# EAGLE board femtoBeacon_PRO_r3.0.1_single_sided_PANELIZED_1x5 (EAGLE 7.6.0), part 1 of 4
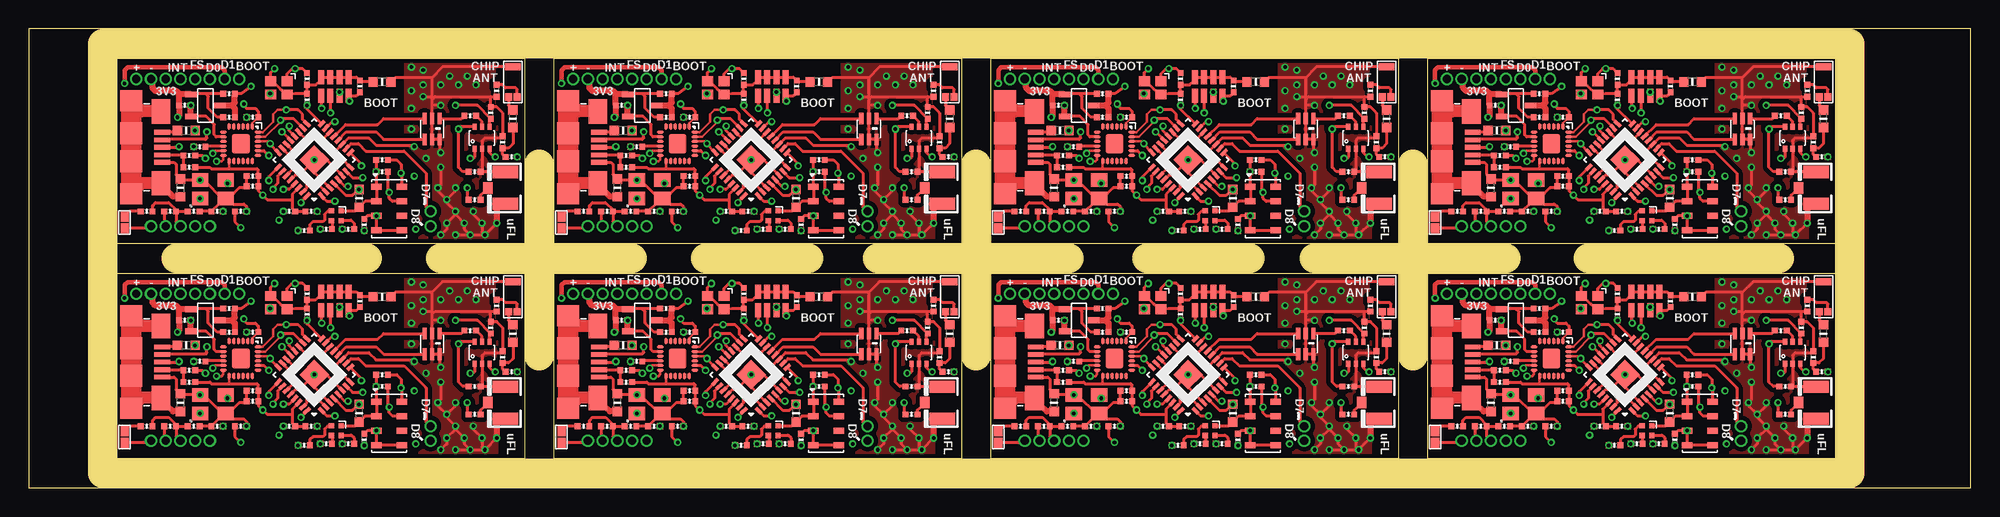
[diagram p0: board, top side]
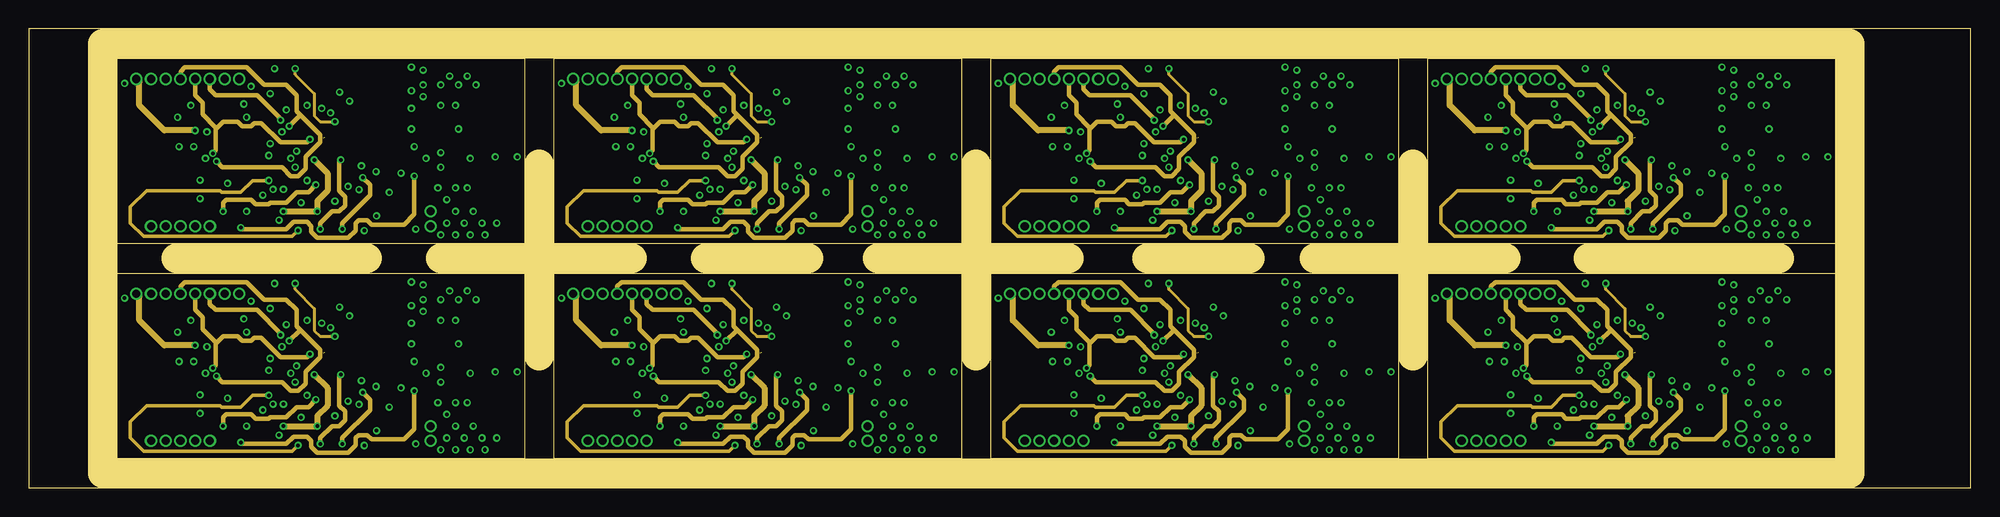
[diagram p1: board, inner layer Route2]
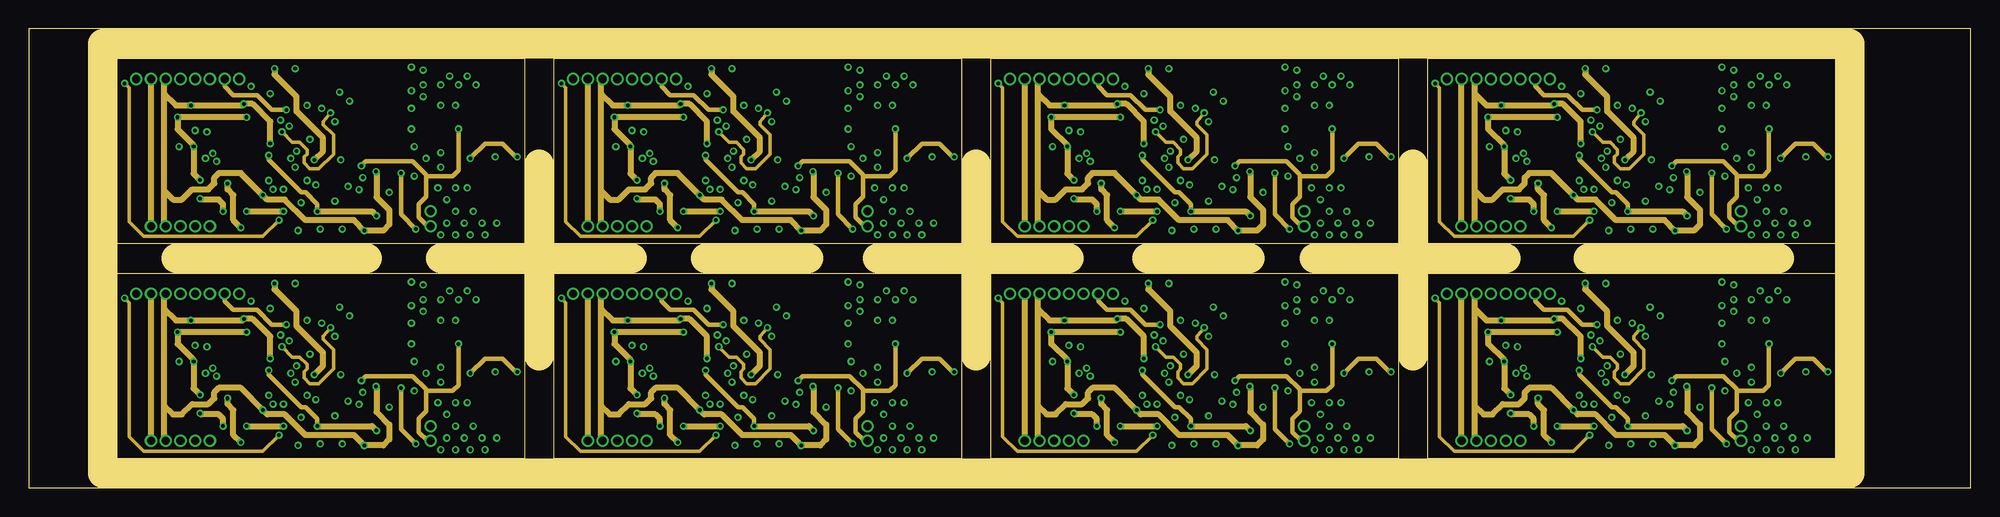
[diagram p2: board, inner layer Route15]
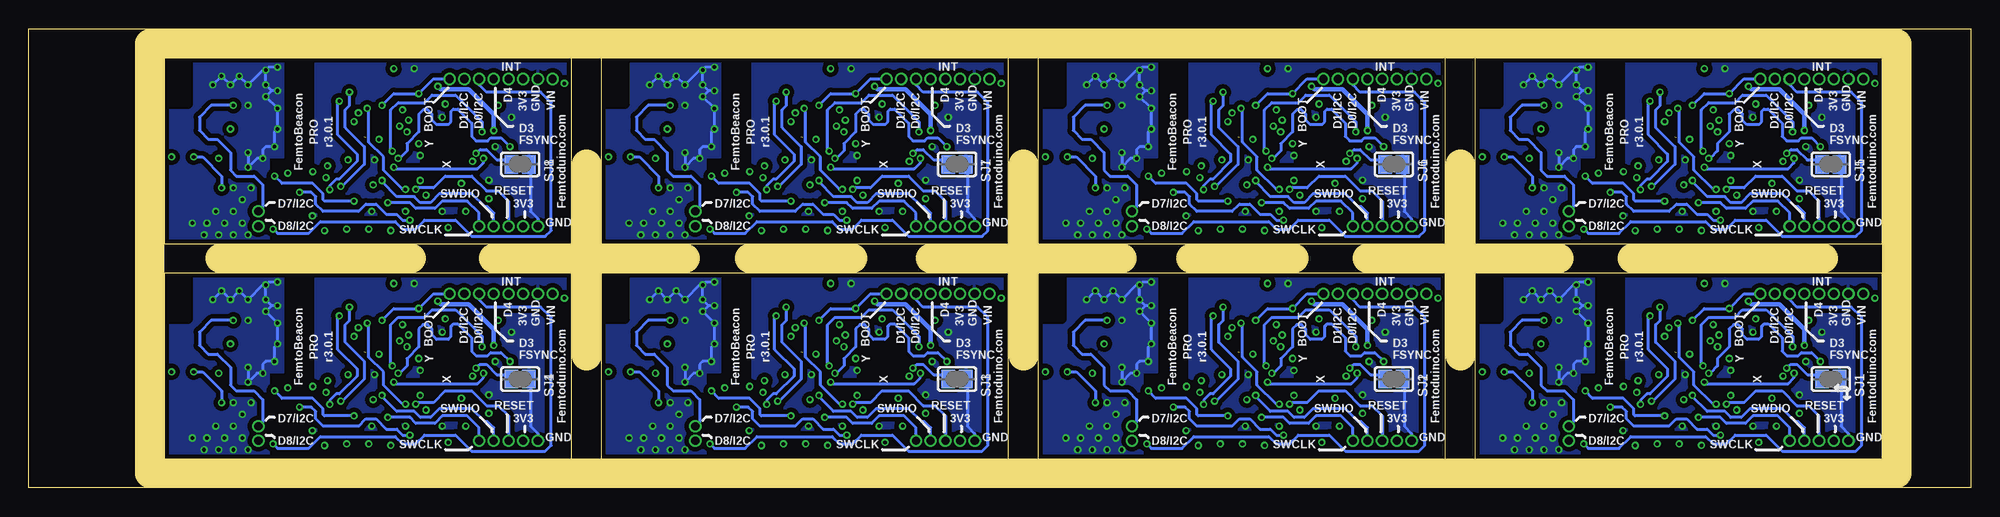
[diagram p3: board, bottom side, seen from below]

Size 167.64 x 39.62 mm. Coordinates in mm from the lower left corner, seen from the top.
Outline: 7.62,2.54 7.62,18.54 42.8,18.54 42.8,2.54 7.62,2.54
Outline: 45.34,2.54 45.34,18.54 80.52,18.54 80.52,2.54 45.34,2.54
Outline: 83.06,2.54 83.06,18.54 118.24,18.54 118.24,2.54 83.06,2.54
Outline: 120.78,2.54 120.78,18.54 155.96,18.54 155.96,2.54 120.78,2.54
Outline: 7.62,21.08 7.62,37.08 42.8,37.08 42.8,21.08 7.62,21.08
Outline: 45.34,21.08 45.34,37.08 80.52,37.08 80.52,21.08 45.34,21.08
Outline: 83.06,21.08 83.06,37.08 118.24,37.08 118.24,21.08 83.06,21.08
Outline: 120.78,21.08 120.78,37.08 155.96,37.08 155.96,21.08 120.78,21.08
Outline: 0,0 167.64,0 167.64,39.62 0,39.62 0,0
Copper layers (1*2*15*16): Top 0.035mm / dielectric 0.23mm / Route2 0.035mm / dielectric 0.93mm / Route15 0.035mm / dielectric 0.23mm / Bottom 0.035mm
Design rules "MF_Standard_4_Layer": minimum track width 6mil, minimum drill 12mil, track to track 6mil, track to pad 6mil, pad to pad 6mil, via to via 6mil, smd to smd 0mil, copper to edge 10mil, drill to drill 10mil, minimum pad ring 6mil, minimum via ring 6mil, stop-mask expansion 2mil, vias tented up to drill 25mil, thermal gap 10mil
tRestrict: area 40.8,14.6 to 42.8,18.5; area 16.8,9.7 to 19.8,12.7; area 78.5,14.6 to 80.5,18.5; area 54.5,9.7 to 57.5,12.7; area 116.2,14.6 to 118.2,18.5; area 92.2,9.7 to 95.2,12.7; area 153.9,14.6 to 156,18.5; area 129.9,9.7 to 133,12.7; area 40.8,33.1 to 42.8,37.1; area 16.8,28.2 to 19.8,31.2; area 78.5,33.1 to 80.5,37.1; area 54.5,28.2 to 57.5,31.2; 4 more areas
bRestrict: area 40.8,14.6 to 42.8,18.5; area 16.8,9.7 to 19.8,12.7; area 78.5,14.6 to 80.5,18.5; area 54.5,9.7 to 57.5,12.7; area 116.2,14.6 to 118.2,18.5; area 92.2,9.7 to 95.2,12.7; area 153.9,14.6 to 156,18.5; area 129.9,9.7 to 133,12.7; area 40.8,33.1 to 42.8,37.1; area 16.8,28.2 to 19.8,31.2; area 78.5,33.1 to 80.5,37.1; area 54.5,28.2 to 57.5,31.2; 4 more areas
Milling: 14 lines

## Footprints (pad centres in the part's own frame; a part is rotated, then mirrored left to right if it is on the bottom)
AS222-92LF = smd 0.35 x 0.5: PIN1 -0.65,-0.95; PIN2 0,-0.95; PIN3 0.65,-0.95; PIN4 0.65,0.95; PIN5 0,0.95; PIN6 -0.65,0.95
0805_BALUN = smd 1 x 0.35: 1 -0.9,0.65; 2 -0.9,0; 3 -0.9,-0.65; 4 0.9,-0.65; 5 0.9,0; 6 0.9,0.65
MS5611-01BA03 = smd 0.9 x 0.5: 1 -1.1,1.875; 2 -1.1,0.625; 3 -1.1,-0.625; 4 -1.1,-1.875; 5 1.1,-1.875; 6 1.1,-0.625; 7 1.1,0.625; 8 1.1,1.875
SPST_SMD = smd 0.889 x 0.699: 1 -0.508,0; 2 0.508,0
_0402MP = smd 0.5 x 0.5: 1 -0.508,0; 2 0.508,0
CAPACITOR_ARRAY_1206_MONO_1X4 = smd 0.52 x 1.2: 1 -1.2,0.8; 2 -1.2,-0.8; 3 -0.4,0.8; 4 -0.4,-0.8; 5 0.4,0.8; 6 0.4,-0.8; 7 1.2,0.8; 8 1.2,-0.8
_0603MP = smd 0.8 x 0.8: 1 -0.762,0; 2 0.762,0
QFN32 = smd 0.7 x 0.3: 1 -2.65,1.75; 2 -2.65,1.25; 3 -2.65,0.75; 4 -2.65,0.25; 5 -2.65,-0.25; 6 -2.65,-0.75; 7 -2.65,-1.25; 8 -2.65,-1.75; 17 2.65,-1.75; 18 2.65,-1.25; 19 2.65,-0.75; 20 2.65,-0.25; 21 2.65,0.25; 22 2.65,0.75; 23 2.65,1.25; 24 2.65,1.75 | smd 0.3 x 0.7: 9 -1.75,-2.65; 10 -1.25,-2.65; 11 -0.75,-2.65; 12 -0.25,-2.65; 13 0.25,-2.65; 14 0.75,-2.65; 15 1.25,-2.65; 16 1.75,-2.65; 25 1.75,2.65; 26 1.25,2.65; 27 0.75,2.65; 28 0.25,2.65; 29 -0.25,2.65; 30 -0.75,2.65; 31 -1.25,2.65; 32 -1.75,2.65 | smd 1.8 x 1.8: 33 0,0
QFN_3X3MM = smd 0.6 x 0.25: P$1 -1.5,1; P$2 -1.5,0.6; P$3 -1.5,0.2; P$4 -1.5,-0.2; P$5 -1.5,-0.6; P$6 -1.5,-1; P$13 1.5,-1; P$14 1.5,-0.6; P$15 1.5,-0.2; P$16 1.5,0.2; P$17 1.5,0.6; P$18 1.5,1 | smd 0.25 x 0.6: P$7 -1,-1.5; P$8 -0.6,-1.5; P$9 -0.2,-1.5; P$10 0.2,-1.5; P$11 0.6,-1.5; P$12 1,-1.5; P$19 1,1.5; P$20 0.6,1.5; P$21 0.2,1.5; P$22 -0.2,1.5; P$23 -0.6,1.5; P$24 -1,1.5 | smd 1.7 x 1.54: P$25 0,0
MCP1700T-3302E/TT = smd 0.5 x 1: GND -0.95,-1.25; VIN 0,1.25; VOUT 0.95,-1.25
LRTB_R48G = smd 0.45 x 0.45: 1 0.425,0.425; 2 0.425,-0.425; 3 -0.425,-0.425; 4 -0.425,0.425
SOLDERJUMPER_CLOSEDWIRE = smd 1.168 x 1.6: 1 -0.762,0; 2 0.762,0 | smd 0.635 x 0.203: WIRE 0,0
ANT_BAR = smd 0.62 x 0.61: 1 -1.3,0.37; 2 -1.3,-0.38 | smd 0.62 x 1.36: 3 1.3,0
1X8_ROUND = drill 0.7 pad 1: P$1 0,0; P$2 0,-1.27; P$3 0,-2.54; P$4 0,-3.81; P$5 0,-5.08; P$6 0,-6.35; P$7 0,-7.62; P$8 0,-8.89
1X5_ROUND = drill 0.7 pad 1: P$1 0,0; P$2 0,-1.27; P$3 0,-2.54; P$4 0,-3.81; P$5 0,-5.08
1X2_ROUND = drill 0.7 pad 1: P$1 0,0; P$2 0,-1.27
U.FL = smd 2.2 x 1.05: 1 0,1.375; 2 0,-1.375 | smd 0.8 x 1: 3 1.525,0
USB_MICROB_PACKAGE = smd 0.4 x 1.35: 1 -1.3,1.47; 2 -0.64,1.47; 3 0,1.47; 4 0.66,1.47; 5 1.3,1.47 | smd 2.1 x 1.6: 6 -3.1,1.35; 11 3.1,1.35 | smd 1.8 x 1.9: 7 -4,-1.2; 10 4,-1.2 | smd 1.9 x 1.9: 8 -1.2,-1.2; 9 1.2,-1.2
FA-128 = smd 0.95 x 0.85: 1 -0.725,-0.575; 2 0.725,-0.575; 3 0.725,0.575; 4 -0.725,0.575
TSX-3225 = smd 1.4 x 1.15: 1 -1.1,-0.8; 2 1.1,-0.8; 3 1.1,0.8; 4 -1.1,0.8

## Placement (x,y rotation side)
ASWITCH  AS222-92LF  [AS222-92LF]  39.12,11.68 0 top
ASWITCH1  AS222-92LF  [AS222-92LF]  76.83,11.68 0 top
ASWITCH2  AS222-92LF  [AS222-92LF]  114.55,11.68 0 top
ASWITCH3  AS222-92LF  [AS222-92LF]  152.27,11.68 0 top
ASWITCH4  AS222-92LF  [AS222-92LF]  39.12,30.23 0 top
ASWITCH5  AS222-92LF  [AS222-92LF]  76.83,30.23 0 top
ASWITCH6  AS222-92LF  [AS222-92LF]  114.55,30.23 0 top
ASWITCH7  AS222-92LF  [AS222-92LF]  152.27,30.23 0 top
BALUN  JOHANSON_2450BM15A0015E  [0805_BALUN]  34.8,12.45 270 top
BALUN1  JOHANSON_2450BM15A0015E  [0805_BALUN]  72.52,12.45 270 top
BALUN2  JOHANSON_2450BM15A0015E  [0805_BALUN]  110.24,12.45 270 top
BALUN3  JOHANSON_2450BM15A0015E  [0805_BALUN]  147.96,12.45 270 top
BALUN4  JOHANSON_2450BM15A0015E  [0805_BALUN]  34.8,30.99 270 top
BALUN5  JOHANSON_2450BM15A0015E  [0805_BALUN]  72.52,30.99 270 top
BALUN6  JOHANSON_2450BM15A0015E  [0805_BALUN]  110.24,30.99 270 top
BALUN7  JOHANSON_2450BM15A0015E  [0805_BALUN]  147.96,30.99 270 top
BARO  MS5611-01BA03  [MS5611-01BA03]  31.11,5.58 0 top
BARO1  MS5611-01BA03  [MS5611-01BA03]  68.83,5.58 0 top
BARO2  MS5611-01BA03  [MS5611-01BA03]  106.55,5.58 0 top
BARO3  MS5611-01BA03  [MS5611-01BA03]  144.27,5.58 0 top
BARO4  MS5611-01BA03  [MS5611-01BA03]  31.11,24.12 0 top
BARO5  MS5611-01BA03  [MS5611-01BA03]  68.83,24.12 0 top
BARO6  MS5611-01BA03  [MS5611-01BA03]  106.55,24.12 0 top
BARO7  MS5611-01BA03  [MS5611-01BA03]  144.27,24.12 0 top
BTN_RESET  DNP  [SPST_SMD]  8.26,4.39 270 top
BTN_RESET1  DNP  [SPST_SMD]  45.97,4.39 270 top
BTN_RESET2  DNP  [SPST_SMD]  83.69,4.39 270 top
BTN_RESET3  DNP  [SPST_SMD]  121.41,4.39 270 top
BTN_RESET4  DNP  [SPST_SMD]  8.26,22.94 270 top
BTN_RESET5  DNP  [SPST_SMD]  45.97,22.94 270 top
BTN_RESET6  DNP  [SPST_SMD]  83.69,22.94 270 top
BTN_RESET7  DNP  [SPST_SMD]  121.41,22.94 270 top
C1  0.1uF  [_0402MP]  14.22,5.33 0 top
C2  22pF, C0G, 5%  [_0402MP]  38.1,13.59 0 top
C3  10pF  [_0402MP]  24,16.76 90 top
C4  10pF  [_0402MP]  24,14.99 90 top
C5  2.2uF  [_0402MP]  13.46,14.48 180 top
C6  2.2uF  [_0402MP]  17.27,15.49 180 top
C7  0.47uF  [_0402MP]  17.27,13.46 180 top
C8  22pF, C0G, 5%  [_0402MP]  39.88,13.84 90 top
C9  22pF, C0G, 5%  [_0402MP]  38.48,8.76 0 top
C10  0.1uF  [_0402MP]  19.3,13.46 180 top
C11  22pF, C0G, 5%  [_0402MP]  38.48,6.35 0 top
C12  22pF, C0G, 5%  [_0402MP]  41.66,10.03 180 top
C13  DNP  [_0402MP]  40.39,15.75 270 top
C14  9pF  [_0402MP]  16.26,5.33 0 top
C15  9pF  [_0402MP]  18.29,5.33 0 top
C16  0.1uF  [_0402MP]  24.38,5.33 0 top
C17  1.2pF  [_0402MP]  40.89,11.3 90 top
C18  0.1uF  [_0402MP]  51.94,5.33 0 top
C19  2.2uF  [_0402MP]  51.18,14.48 180 top
C20  2.2uF  [_0402MP]  54.99,15.49 180 top
C21  10uF  [_0402MP]  22.48,5.33 0 top
C22  10uF  [_0402MP]  28.57,16.13 270 top
C23  0.47uF  [_0402MP]  54.99,13.46 180 top
C24  0.1uF  [_0402MP]  66.67,4.18 90 top
C25  0.1uF  [_0402MP]  62.1,5.33 0 top
C26  10uF  [_0402MP]  60.2,5.33 0 top
C27  10uF  [_0402MP]  66.29,16.13 270 top
C28  0.1uF  [_0402MP]  57.02,13.46 180 top
C29  0.1uF  [_0402MP]  28.96,4.18 90 top
C30  0.1uF  [_0402MP]  19.3,7.49 0 top
C31  10000pF  [_0402MP]  19.3,8.38 0 top
C32  0.1uF  [_0402MP]  14.73,10.92 180 top
C33  10pF  [_0402MP]  61.72,16.76 90 top
C34  10pF  [_0402MP]  61.72,14.99 90 top
C35  DNP  [_0402MP]  78.11,15.75 270 top
C36  9pF  [_0402MP]  53.98,5.33 0 top
C37  9pF  [_0402MP]  56.01,5.33 0 top
C38  10000pF  [_0402MP]  57.02,8.38 0 top
C39  0.1uF  [_0402MP]  57.02,7.49 0 top
C40  0.1uF  [_0402MP]  52.45,10.92 180 top
C41  22pF, C0G, 5%  [_0402MP]  75.82,13.59 0 top
C42  22pF, C0G, 5%  [_0402MP]  77.6,13.84 90 top
C43  22pF, C0G, 5%  [_0402MP]  76.2,8.76 0 top
C44  22pF, C0G, 5%  [_0402MP]  76.2,6.35 0 top
C45  22pF, C0G, 5%  [_0402MP]  79.38,10.03 180 top
C46  1.2pF  [_0402MP]  78.61,11.3 90 top
C47  0.1uF  [_0402MP]  89.66,5.33 0 top
C48  2.2uF  [_0402MP]  88.9,14.48 180 top
C49  2.2uF  [_0402MP]  92.71,15.49 180 top
C50  0.47uF  [_0402MP]  92.71,13.46 180 top
C51  0.1uF  [_0402MP]  104.39,4.18 90 top
C52  0.1uF  [_0402MP]  99.82,5.33 0 top
C53  10uF  [_0402MP]  97.92,5.33 0 top
C54  10uF  [_0402MP]  104.01,16.13 270 top
C55  0.1uF  [_0402MP]  94.74,13.46 180 top
C56  10pF  [_0402MP]  99.44,16.76 90 top
C57  10pF  [_0402MP]  99.44,14.99 90 top
C58  DNP  [_0402MP]  115.82,15.75 270 top
C59  9pF  [_0402MP]  91.69,5.33 0 top
C60  9pF  [_0402MP]  93.73,5.33 0 top
C61  10000pF  [_0402MP]  94.74,8.38 0 top
C62  0.1uF  [_0402MP]  94.74,7.49 0 top
C63  0.1uF  [_0402MP]  90.17,10.92 180 top
C64  22pF, C0G, 5%  [_0402MP]  113.54,13.59 0 top
C65  22pF, C0G, 5%  [_0402MP]  115.32,13.84 90 top
C66  22pF, C0G, 5%  [_0402MP]  113.92,8.76 0 top
C67  22pF, C0G, 5%  [_0402MP]  113.92,6.35 0 top
C68  22pF, C0G, 5%  [_0402MP]  117.09,10.03 180 top
C69  1.2pF  [_0402MP]  116.33,11.3 90 top
C70  0.1uF  [_0402MP]  127.38,5.33 0 top
C71  2.2uF  [_0402MP]  126.62,14.48 180 top
C72  2.2uF  [_0402MP]  130.43,15.49 180 top
C73  0.47uF  [_0402MP]  130.43,13.46 180 top
C74  0.1uF  [_0402MP]  142.11,4.18 90 top
C75  0.1uF  [_0402MP]  137.54,5.33 0 top
C76  10uF  [_0402MP]  135.64,5.33 0 top
C77  10uF  [_0402MP]  141.73,16.13 270 top
C78  0.1uF  [_0402MP]  132.46,13.46 180 top
C79  10pF  [_0402MP]  137.16,16.76 90 top
C80  10pF  [_0402MP]  137.16,14.99 90 top
C81  DNP  [_0402MP]  153.54,15.75 270 top
C82  9pF  [_0402MP]  129.41,5.33 0 top
C83  9pF  [_0402MP]  131.44,5.33 0 top
C84  10000pF  [_0402MP]  132.46,8.38 0 top
C85  0.1uF  [_0402MP]  132.46,7.49 0 top
C86  0.1uF  [_0402MP]  127.89,10.92 180 top
C87  22pF, C0G, 5%  [_0402MP]  151.26,13.59 0 top
C88  22pF, C0G, 5%  [_0402MP]  153.03,13.84 90 top
C89  22pF, C0G, 5%  [_0402MP]  151.64,8.76 0 top
C90  22pF, C0G, 5%  [_0402MP]  151.64,6.35 0 top
C91  22pF, C0G, 5%  [_0402MP]  154.81,10.03 180 top
C92  1.2pF  [_0402MP]  154.05,11.3 90 top
C93  0.1uF  [_0402MP]  14.22,23.88 0 top
C94  2.2uF  [_0402MP]  13.46,33.02 180 top
C95  2.2uF  [_0402MP]  17.27,34.04 180 top
C96  0.47uF  [_0402MP]  17.27,32 180 top
C97  0.1uF  [_0402MP]  28.96,22.72 90 top
C98  0.1uF  [_0402MP]  24.38,23.88 0 top
C99  10uF  [_0402MP]  22.48,23.88 0 top
C100  10uF  [_0402MP]  28.57,34.67 270 top
C101  0.1uF  [_0402MP]  19.3,32 180 top
C102  10pF  [_0402MP]  24,35.31 90 top
C103  10pF  [_0402MP]  24,33.53 90 top
C104  DNP  [_0402MP]  40.39,34.29 270 top
C105  9pF  [_0402MP]  16.26,23.88 0 top
C106  9pF  [_0402MP]  18.29,23.88 0 top
C107  10000pF  [_0402MP]  19.3,26.92 0 top
C108  0.1uF  [_0402MP]  19.3,26.04 0 top
C109  0.1uF  [_0402MP]  14.73,29.46 180 top
C110  22pF, C0G, 5%  [_0402MP]  38.1,32.13 0 top
C111  22pF, C0G, 5%  [_0402MP]  39.88,32.38 90 top
C112  22pF, C0G, 5%  [_0402MP]  38.48,27.3 0 top
C113  22pF, C0G, 5%  [_0402MP]  38.48,24.89 0 top
C114  22pF, C0G, 5%  [_0402MP]  41.66,28.57 180 top
C115  1.2pF  [_0402MP]  40.89,29.84 90 top
C116  0.1uF  [_0402MP]  51.94,23.88 0 top
C117  2.2uF  [_0402MP]  51.18,33.02 180 top
C118  2.2uF  [_0402MP]  54.99,34.04 180 top
C119  0.47uF  [_0402MP]  54.99,32 180 top
C120  0.1uF  [_0402MP]  66.67,22.72 90 top
C121  0.1uF  [_0402MP]  62.1,23.88 0 top
C122  10uF  [_0402MP]  60.2,23.88 0 top
C123  10uF  [_0402MP]  66.29,34.67 270 top
C124  0.1uF  [_0402MP]  57.02,32 180 top
C125  10pF  [_0402MP]  61.72,35.31 90 top
C126  10pF  [_0402MP]  61.72,33.53 90 top
C127  DNP  [_0402MP]  78.11,34.29 270 top
C128  9pF  [_0402MP]  53.98,23.88 0 top
C129  9pF  [_0402MP]  56.01,23.88 0 top
C130  10000pF  [_0402MP]  57.02,26.92 0 top
C131  0.1uF  [_0402MP]  57.02,26.04 0 top
C132  0.1uF  [_0402MP]  52.45,29.46 180 top
C133  22pF, C0G, 5%  [_0402MP]  75.82,32.13 0 top
C134  22pF, C0G, 5%  [_0402MP]  77.6,32.38 90 top
C135  22pF, C0G, 5%  [_0402MP]  76.2,27.3 0 top
C136  22pF, C0G, 5%  [_0402MP]  76.2,24.89 0 top
C137  22pF, C0G, 5%  [_0402MP]  79.38,28.57 180 top
C138  1.2pF  [_0402MP]  78.61,29.84 90 top
C139  0.1uF  [_0402MP]  89.66,23.88 0 top
C140  2.2uF  [_0402MP]  88.9,33.02 180 top
C141  2.2uF  [_0402MP]  92.71,34.04 180 top
C142  0.47uF  [_0402MP]  92.71,32 180 top
C143  0.1uF  [_0402MP]  104.39,22.72 90 top
C144  0.1uF  [_0402MP]  99.82,23.88 0 top
C145  10uF  [_0402MP]  97.92,23.88 0 top
C146  10uF  [_0402MP]  104.01,34.67 270 top
C147  0.1uF  [_0402MP]  94.74,32 180 top
C148  10pF  [_0402MP]  99.44,35.31 90 top
C149  10pF  [_0402MP]  99.44,33.53 90 top
C150  DNP  [_0402MP]  115.82,34.29 270 top
C151  9pF  [_0402MP]  91.69,23.88 0 top
C152  9pF  [_0402MP]  93.73,23.88 0 top
C153  10000pF  [_0402MP]  94.74,26.92 0 top
C154  0.1uF  [_0402MP]  94.74,26.04 0 top
C155  0.1uF  [_0402MP]  90.17,29.46 180 top
C156  22pF, C0G, 5%  [_0402MP]  113.54,32.13 0 top
C157  22pF, C0G, 5%  [_0402MP]  115.32,32.38 90 top
C158  22pF, C0G, 5%  [_0402MP]  113.92,27.3 0 top
C159  22pF, C0G, 5%  [_0402MP]  113.92,24.89 0 top
C160  22pF, C0G, 5%  [_0402MP]  117.09,28.57 180 top
C161  1.2pF  [_0402MP]  116.33,29.84 90 top
C162  0.1uF  [_0402MP]  127.38,23.88 0 top
C163  2.2uF  [_0402MP]  126.62,33.02 180 top
C164  2.2uF  [_0402MP]  130.43,34.04 180 top
C165  0.47uF  [_0402MP]  130.43,32 180 top
C166  0.1uF  [_0402MP]  142.11,22.72 90 top
C167  0.1uF  [_0402MP]  137.54,23.88 0 top
C168  10uF  [_0402MP]  135.64,23.88 0 top
C169  10uF  [_0402MP]  141.73,34.67 270 top
C170  0.1uF  [_0402MP]  132.46,32 180 top
C171  10pF  [_0402MP]  137.16,35.31 90 top
C172  10pF  [_0402MP]  137.16,33.53 90 top
C173  DNP  [_0402MP]  153.54,34.29 270 top
C174  9pF  [_0402MP]  129.41,23.88 0 top
C175  9pF  [_0402MP]  131.44,23.88 0 top
C176  10000pF  [_0402MP]  132.46,26.92 0 top
C177  0.1uF  [_0402MP]  132.46,26.04 0 top
C178  0.1uF  [_0402MP]  127.89,29.46 180 top
C179  22pF, C0G, 5%  [_0402MP]  151.26,32.13 0 top
C180  22pF, C0G, 5%  [_0402MP]  153.03,32.38 90 top
C181  22pF, C0G, 5%  [_0402MP]  151.64,27.3 0 top
C182  22pF, C0G, 5%  [_0402MP]  151.64,24.89 0 top
C183  22pF, C0G, 5%  [_0402MP]  154.81,28.57 180 top
C184  1.2pF  [_0402MP]  154.05,29.84 90 top
C_ARR  0.1uF  [CAPACITOR_ARRAY_1206_MONO_1X4]  26.42,16.13 180 top
C_ARR1  0.1uF  [CAPACITOR_ARRAY_1206_MONO_1X4]  64.14,16.13 180 top
C_ARR2  0.1uF  [CAPACITOR_ARRAY_1206_MONO_1X4]  101.85,16.13 180 top
C_ARR3  0.1uF  [CAPACITOR_ARRAY_1206_MONO_1X4]  139.57,16.13 180 top
C_ARR4  0.1uF  [CAPACITOR_ARRAY_1206_MONO_1X4]  26.42,34.67 180 top
C_ARR5  0.1uF  [CAPACITOR_ARRAY_1206_MONO_1X4]  64.14,34.67 180 top
C_ARR6  0.1uF  [CAPACITOR_ARRAY_1206_MONO_1X4]  101.85,34.67 180 top
C_ARR7  0.1uF  [CAPACITOR_ARRAY_1206_MONO_1X4]  139.57,34.67 180 top
FB1  [_0603MP]  13.08,7.37 90 top
FB2  [_0603MP]  13.59,12.32 0 top
FB3  [_0603MP]  30.48,16.51 0 top
FB4  [_0603MP]  50.8,7.37 90 top
FB5  [_0603MP]  51.31,12.32 0 top
FB6  [_0603MP]  68.2,16.51 0 top
FB7  [_0603MP]  88.52,7.37 90 top
FB8  [_0603MP]  89.03,12.32 0 top
FB9  [_0603MP]  105.92,16.51 0 top
FB10  [_0603MP]  126.24,7.37 90 top
FB11  [_0603MP]  126.75,12.32 0 top
FB12  [_0603MP]  143.64,16.51 0 top
FB13  [_0603MP]  13.08,25.91 90 top
FB14  [_0603MP]  13.59,30.86 0 top
FB15  [_0603MP]  30.48,35.05 0 top
FB16  [_0603MP]  50.8,25.91 90 top
FB17  [_0603MP]  51.31,30.86 0 top
FB18  [_0603MP]  68.2,35.05 0 top
FB19  [_0603MP]  88.52,25.91 90 top
FB20  [_0603MP]  89.03,30.86 0 top
FB21  [_0603MP]  105.92,35.05 0 top
FB22  [_0603MP]  126.24,25.91 90 top
FB23  [_0603MP]  126.75,30.86 0 top
FB24  [_0603MP]  143.64,35.05 0 top
IC  ATSAMR21E18A-MUT  [QFN32]  24.64,9.78 135 top
IC1  ATSAMR21E18A-MUT  [QFN32]  62.36,9.78 135 top
IC2  ATSAMR21E18A-MUT  [QFN32]  100.08,9.78 135 top
IC3  ATSAMR21E18A-MUT  [QFN32]  137.79,9.78 135 top
IC4  ATSAMR21E18A-MUT  [QFN32]  24.64,28.32 135 top
IC5  ATSAMR21E18A-MUT  [QFN32]  62.36,28.32 135 top
IC6  ATSAMR21E18A-MUT  [QFN32]  100.08,28.32 135 top
IC7  ATSAMR21E18A-MUT  [QFN32]  137.79,28.32 135 top
IMU  MPU-9250  [QFN_3X3MM]  18.29,11.18 270 top
IMU1  MPU-9250  [QFN_3X3MM]  56.01,11.18 270 top
IMU2  MPU-9250  [QFN_3X3MM]  93.73,11.18 270 top
IMU3  MPU-9250  [QFN_3X3MM]  131.44,11.18 270 top
IMU4  MPU-9250  [QFN_3X3MM]  18.29,29.72 270 top
IMU5  MPU-9250  [QFN_3X3MM]  56.01,29.72 270 top
IMU6  MPU-9250  [QFN_3X3MM]  93.73,29.72 270 top
IMU7  MPU-9250  [QFN_3X3MM]  131.44,29.72 270 top
L1  1.8nH  [_0603MP]  41.78,13.34 90 top
L2  10uH  [_0603MP]  66.22,6.46 90 top
L3  1.8nH  [_0603MP]  79.5,13.34 90 top
L4  10uH  [_0603MP]  103.94,6.46 90 top
L5  1.8nH  [_0603MP]  117.22,13.34 90 top
L6  10uH  [_0603MP]  28.51,6.46 90 top
L7  10uH  [_0603MP]  141.66,6.46 90 top
L8  1.8nH  [_0603MP]  154.94,13.34 90 top
L9  10uH  [_0603MP]  28.51,25 90 top
L10  1.8nH  [_0603MP]  41.78,31.88 90 top
L11  10uH  [_0603MP]  66.22,25 90 top
L12  1.8nH  [_0603MP]  79.5,31.88 90 top
L13  10uH  [_0603MP]  103.94,25 90 top
L14  1.8nH  [_0603MP]  117.22,31.88 90 top
L15  10uH  [_0603MP]  141.66,25 90 top
L16  1.8nH  [_0603MP]  154.94,31.88 90 top
LDO_VREG  MCP1700T-3302E/TT  [MCP1700T-3302E/TT]  15.24,14.48 270 top
LDO_VREG1  MCP1700T-3302E/TT  [MCP1700T-3302E/TT]  52.96,14.48 270 top
LDO_VREG2  MCP1700T-3302E/TT  [MCP1700T-3302E/TT]  90.68,14.48 270 top
LDO_VREG3  MCP1700T-3302E/TT  [MCP1700T-3302E/TT]  128.4,14.48 270 top
LDO_VREG4  MCP1700T-3302E/TT  [MCP1700T-3302E/TT]  15.24,33.02 270 top
LDO_VREG5  MCP1700T-3302E/TT  [MCP1700T-3302E/TT]  52.96,33.02 270 top
LDO_VREG6  MCP1700T-3302E/TT  [MCP1700T-3302E/TT]  90.68,33.02 270 top
LDO_VREG7  MCP1700T-3302E/TT  [MCP1700T-3302E/TT]  128.4,33.02 270 top
R1  330  [_0402MP]  10.16,5.33 0 top
R2  10K  [_0402MP]  12.19,5.33 0 top
R3  330  [_0402MP]  13.84,10.16 0 top
R4  330  [_0402MP]  27.56,3.81 0 top
R5  100K  [_0402MP]  13.84,9.14 0 top
R6  330  [_0402MP]  25.65,3.81 0 top
R7  330  [_0402MP]  23.75,3.68 0 top
R8  2.2K  [_0402MP]  30.48,8.76 180 top
R9  2.2K  [_0402MP]  30.48,9.78 180 top
R10  330  [_0402MP]  47.88,5.33 0 top
R11  10K  [_0402MP]  49.91,5.33 0 top
R12  330  [_0402MP]  65.28,3.81 0 top
R13  2.2K  [_0402MP]  68.2,8.76 180 top
R14  2.2K  [_0402MP]  68.2,9.78 180 top
R15  330  [_0402MP]  51.56,10.16 0 top
R16  100K  [_0402MP]  51.56,9.14 0 top
R17  330  [_0402MP]  63.37,3.81 0 top
R18  330  [_0402MP]  61.47,3.68 0 top
R19  330  [_0402MP]  85.6,5.33 0 top
R20  10K  [_0402MP]  87.63,5.33 0 top
R21  330  [_0402MP]  103,3.81 0 top
R22  2.2K  [_0402MP]  105.92,8.76 180 top
R23  2.2K  [_0402MP]  105.92,9.78 180 top
R24  330  [_0402MP]  89.28,10.16 0 top
R25  100K  [_0402MP]  89.28,9.14 0 top
R26  330  [_0402MP]  101.09,3.81 0 top
R27  330  [_0402MP]  99.19,3.68 0 top
R28  330  [_0402MP]  123.32,5.33 0 top
R29  10K  [_0402MP]  125.35,5.33 0 top
R30  330  [_0402MP]  140.72,3.81 0 top
R31  2.2K  [_0402MP]  143.64,8.76 180 top
R32  2.2K  [_0402MP]  143.64,9.78 180 top
R33  330  [_0402MP]  127,10.16 0 top
R34  100K  [_0402MP]  127,9.14 0 top
R35  330  [_0402MP]  138.81,3.81 0 top
R36  330  [_0402MP]  136.91,3.68 0 top
R37  330  [_0402MP]  10.16,23.88 0 top
R38  10K  [_0402MP]  12.19,23.88 0 top
R39  330  [_0402MP]  27.56,22.35 0 top
R40  2.2K  [_0402MP]  30.48,27.3 180 top
R41  2.2K  [_0402MP]  30.48,28.32 180 top
R42  330  [_0402MP]  13.84,28.7 0 top
R43  100K  [_0402MP]  13.84,27.69 0 top
R44  330  [_0402MP]  25.65,22.35 0 top
R45  330  [_0402MP]  23.75,22.23 0 top
R46  330  [_0402MP]  47.88,23.88 0 top
R47  10K  [_0402MP]  49.91,23.88 0 top
R48  330  [_0402MP]  65.28,22.35 0 top
R49  2.2K  [_0402MP]  68.2,27.3 180 top
R50  2.2K  [_0402MP]  68.2,28.32 180 top
R51  330  [_0402MP]  51.56,28.7 0 top
R52  100K  [_0402MP]  51.56,27.69 0 top
R53  330  [_0402MP]  63.37,22.35 0 top
R54  330  [_0402MP]  61.47,22.23 0 top
R55  330  [_0402MP]  85.6,23.88 0 top
R56  10K  [_0402MP]  87.63,23.88 0 top
R57  330  [_0402MP]  103,22.35 0 top
R58  2.2K  [_0402MP]  105.92,27.3 180 top
R59  2.2K  [_0402MP]  105.92,28.32 180 top
R60  330  [_0402MP]  89.28,28.7 0 top
R61  100K  [_0402MP]  89.28,27.69 0 top
R62  330  [_0402MP]  101.09,22.35 0 top
R63  330  [_0402MP]  99.19,22.23 0 top
R64  330  [_0402MP]  123.32,23.88 0 top
R65  10K  [_0402MP]  125.35,23.88 0 top
R66  330  [_0402MP]  140.72,22.35 0 top
R67  2.2K  [_0402MP]  143.64,27.3 180 top
R68  2.2K  [_0402MP]  143.64,28.32 180 top
R69  330  [_0402MP]  127,28.7 0 top
R70  100K  [_0402MP]  127,27.69 0 top
R71  330  [_0402MP]  138.81,22.35 0 top
R72  330  [_0402MP]  136.91,22.23 0 top
RGBLED  LRTB_R48G  [LRTB_R48G]  26.54,4.95 0 top
RGBLED1  LRTB_R48G  [LRTB_R48G]  64.26,4.95 0 top
RGBLED2  LRTB_R48G  [LRTB_R48G]  101.98,4.95 0 top
RGBLED3  LRTB_R48G  [LRTB_R48G]  139.7,4.95 0 top
RGBLED4  LRTB_R48G  [LRTB_R48G]  26.54,23.5 0 top
RGBLED5  LRTB_R48G  [LRTB_R48G]  64.26,23.5 0 top
RGBLED6  LRTB_R48G  [LRTB_R48G]  101.98,23.5 0 top
RGBLED7  LRTB_R48G  [LRTB_R48G]  139.7,23.5 0 top
SJ1  [SOLDERJUMPER_CLOSEDWIRE]  12.06,9.4 180 bottom
SJ2  [SOLDERJUMPER_CLOSEDWIRE]  49.78,9.4 180 bottom
SJ3  [SOLDERJUMPER_CLOSEDWIRE]  87.5,9.4 180 bottom
SJ4  [SOLDERJUMPER_CLOSEDWIRE]  125.22,9.4 180 bottom
SJ5  [SOLDERJUMPER_CLOSEDWIRE]  12.06,27.94 180 bottom
SJ6  [SOLDERJUMPER_CLOSEDWIRE]  49.78,27.94 180 bottom
SJ7  [SOLDERJUMPER_CLOSEDWIRE]  87.5,27.94 180 bottom
SJ8  [SOLDERJUMPER_CLOSEDWIRE]  125.22,27.94 180 bottom
SMDANT  PULSE_ANT_2.4GHZ  [ANT_BAR]  41.78,16.51 90 top
SMDANT1  PULSE_ANT_2.4GHZ  [ANT_BAR]  79.5,16.51 90 top
SMDANT2  PULSE_ANT_2.4GHZ  [ANT_BAR]  117.22,16.51 90 top
SMDANT3  PULSE_ANT_2.4GHZ  [ANT_BAR]  154.94,16.51 90 top
SMDANT4  PULSE_ANT_2.4GHZ  [ANT_BAR]  41.78,35.05 90 top
SMDANT5  PULSE_ANT_2.4GHZ  [ANT_BAR]  79.5,35.05 90 top
SMDANT6  PULSE_ANT_2.4GHZ  [ANT_BAR]  117.22,35.05 90 top
SMDANT7  PULSE_ANT_2.4GHZ  [ANT_BAR]  154.94,35.05 90 top
U$1  1X8_ROUND  [1X8_ROUND]  46.99,16.76 90 top
U$2  1X5_ROUND  [1X5_ROUND]  48.26,4.06 90 top
U$3  1X2_ROUND  [1X2_ROUND]  72.39,5.33 0 top
U$4  1X8_ROUND  [1X8_ROUND]  84.71,16.76 90 top
U$5  1X8_ROUND  [1X8_ROUND]  9.27,16.76 90 top
U$6  1X5_ROUND  [1X5_ROUND]  85.98,4.06 90 top
U$7  1X2_ROUND  [1X2_ROUND]  110.11,5.33 0 top
U$8  1X8_ROUND  [1X8_ROUND]  122.43,16.76 90 top
U$9  1X2_ROUND  [1X2_ROUND]  34.67,5.33 0 top
U$10  1X5_ROUND  [1X5_ROUND]  10.54,4.06 90 top
U$11  1X5_ROUND  [1X5_ROUND]  123.7,4.06 90 top
U$12  1X2_ROUND  [1X2_ROUND]  147.83,5.33 0 top
U$13  1X8_ROUND  [1X8_ROUND]  9.27,35.31 90 top
U$14  1X5_ROUND  [1X5_ROUND]  10.54,22.61 90 top
U$15  1X2_ROUND  [1X2_ROUND]  34.67,23.88 0 top
U$16  1X8_ROUND  [1X8_ROUND]  46.99,35.31 90 top
U$17  1X5_ROUND  [1X5_ROUND]  48.26,22.61 90 top
U$18  1X2_ROUND  [1X2_ROUND]  72.39,23.88 0 top
U$19  1X8_ROUND  [1X8_ROUND]  84.71,35.31 90 top
U$20  1X5_ROUND  [1X5_ROUND]  85.98,22.61 90 top
U$21  1X2_ROUND  [1X2_ROUND]  110.11,23.88 0 top
U$22  1X8_ROUND  [1X8_ROUND]  122.43,35.31 90 top
U$23  1X5_ROUND  [1X5_ROUND]  123.7,22.61 90 top
U$24  1X2_ROUND  [1X2_ROUND]  147.83,23.88 0 top
UFLANT  [U.FL]  41.15,7.37 180 top
UFLANT1  [U.FL]  78.87,7.37 180 top
UFLANT2  [U.FL]  116.59,7.37 180 top
UFLANT3  [U.FL]  154.31,7.37 180 top
UFLANT4  [U.FL]  41.15,25.91 180 top
UFLANT5  [U.FL]  78.87,25.91 180 top
UFLANT6  [U.FL]  116.59,25.91 180 top
UFLANT7  [U.FL]  154.31,25.91 180 top
USB  USB_MICROB  [USB_MICROB_PACKAGE]  10.03,10.87 270 top
USB1  USB_MICROB  [USB_MICROB_PACKAGE]  47.75,10.87 270 top
USB2  USB_MICROB  [USB_MICROB_PACKAGE]  85.47,10.87 270 top
USB3  USB_MICROB  [USB_MICROB_PACKAGE]  123.19,10.87 270 top
USB4  USB_MICROB  [USB_MICROB_PACKAGE]  10.03,29.41 270 top
USB5  USB_MICROB  [USB_MICROB_PACKAGE]  47.75,29.41 270 top
USB6  USB_MICROB  [USB_MICROB_PACKAGE]  85.47,29.41 270 top
USB7  USB_MICROB  [USB_MICROB_PACKAGE]  123.19,29.41 270 top
XTAL_BOARD  32MHz  [FA-128]  21.59,16 180 top
XTAL_BOARD1  32MHz  [FA-128]  59.31,16 180 top
XTAL_BOARD2  32MHz  [FA-128]  97.03,16 180 top
XTAL_BOARD3  32MHz  [FA-128]  134.75,16 180 top
XTAL_BOARD4  32MHz  [FA-128]  21.59,34.54 180 top
XTAL_BOARD5  32MHz  [FA-128]  59.31,34.54 180 top
XTAL_BOARD6  32MHz  [FA-128]  97.03,34.54 180 top
XTAL_BOARD7  32MHz  [FA-128]  134.75,34.54 180 top
XTAL_RF  16MHz  [TSX-3225]  15.88,7.24 0 top
XTAL_RF1  16MHz  [TSX-3225]  53.59,7.24 0 top
XTAL_RF2  16MHz  [TSX-3225]  91.31,7.24 0 top
XTAL_RF3  16MHz  [TSX-3225]  129.03,7.24 0 top
XTAL_RF4  16MHz  [TSX-3225]  15.88,25.78 0 top
XTAL_RF5  16MHz  [TSX-3225]  53.59,25.78 0 top
XTAL_RF6  16MHz  [TSX-3225]  91.31,25.78 0 top
XTAL_RF7  16MHz  [TSX-3225]  129.03,25.78 0 top

## Library data of the parts
ASWITCH ASWITCH1-ASWITCH7 = skyworks_solutions; MFR_ID: AS222-92LF
BALUN BALUN1-BALUN7 = balun; MFR_ID: 2450BM15A0015E
BARO BARO1-BARO7 = freeimu; MFR_ID: MS561101BA03-50
BTN_RESET BTN_RESET1-BTN_RESET7 = femtoduino
C1 C10 C16 C18 C24 C25 C28-C30 C32 C39 C40 C47 C51 C52 C55 C62 C63 C70 C74 C75 C78 C85 C86 C93 C97 C98 C101 C108 C109 C116 C120 C121 C124 C131 C132 C139 C143 C144 C147 C154 C155 C162 C166 C167 C170 C177 C178 = microbuilder; DIGIKEY_PART: 490-3194-1-ND; MFR_ID: C1005X7R1A104K050BB
C2 C8 C9 C11 C12 C41-C45 C64-C68 C87-C91 C110-C114 C133-C137 C156-C160 C179-C183 = microbuilder; DIGIKEY_PART: 490-3194-1-ND; MFR_ID: GRM1555C1H220JA01D
C3 C4 C33 C34 C56 C57 C79 C80 C102 C103 C125 C126 C148 C149 C171 C172 = microbuilder; DIGIKEY_PART: 490-3194-1-ND
C5 C6 C19 C20 C48 C49 C71 C72 C94 C95 C117 C118 C140 C141 C163 C164 = microbuilder; MFR_ID: GRT155R61C225KE13D
C7 C23 C50 C73 C96 C119 C142 C165 = microbuilder; MFR_ID: C1005X5R1C474K050BC
C13 C35 C58 C81 C104 C127 C150 C173 = microbuilder; DIGIKEY_PART: 490-3194-1-ND; OPTIONAL: 22nF
C14 C15 C36 C37 C59 C60 C82 C83 C105 C106 C128 C129 C151 C152 C174 C175 = microbuilder; DIGIKEY_PART: 490-3194-1-ND; MFR_ID: GRM1555C1H9R0DA01D
C17 C46 C69 C92 C115 C138 C161 C184 = microbuilder; MFR_ID: GRM1555C1H1R2BA01D
C21 C22 C26 C27 C53 C54 C76 C77 C99 C100 C122 C123 C145 C146 C168 C169 = microbuilder; MFR_ID: CL05A106MP5NUNC
C31 C38 C61 C84 C107 C130 C153 C176 = microbuilder; DIGIKEY_PART: 490-3194-1-ND; MFR_ID: GRM155R71E103JA01J
C_ARR C_ARR1-C_ARR7 = array-capacitor; MFR_ID: CA064C104K4RACTU
FB1-FB24 = microbuilder; MFR_ID: BLM18RK102SN1D
IC IC1-IC7 = atmel-samr21; MFR_ID: ATSAMR21E18A-MUT
IMU IMU1-IMU7 = mpu9250; MFR_ID: MPU-9250
L1 L3 L5 L8 L10 L12 L14 L16 = microbuilder; MFR_ID: L-05B1N8SV6T
L2 L4 L6 L7 L9 L11 L13 L15 = microbuilder; MFR_ID: LQM18FN100M00D
LDO_VREG LDO_VREG1-LDO_VREG7 = MCP1700T-3302E_TT; MFR_ID: MCP1700T-3302E/TT
R1-R72 SJ1-SJ8 = microbuilder
RGBLED RGBLED1-RGBLED7 = osram_opto_LED; MFR_ID: LRTB R48G
SMDANT SMDANT1-SMDANT7 = bar_antenna; MFR_ID: W3008
U$1-U$24 = pins_1.27mm_pitch
UFLANT UFLANT1-UFLANT7 = adafruit; MFR_ID: 0734120110
USB USB1-USB7 = femtoduino; MFR_ID: ZX62-B-5PA(33)
XTAL_BOARD XTAL_BOARD1-XTAL_BOARD7 = crystals; MFR_ID: FA-128 32.0000MF20X-K3
XTAL_RF XTAL_RF1-XTAL_RF7 = crystals; MFR_ID: TSX-3225 16.0000MF09Z-AC0

## Nets
3.3V: BARO.1 BARO.2 C5.1 C10.1 C16.1 C21.2 C29.1 C30.2 C31.2 IC.24 IC.30 IMU.P$1 IMU.P$8 IMU.P$13 IMU.P$22 L6.1 LDO_VREG.VOUT R2.1 R5.2 R8.2 R9.2 RGBLED.1 U$5.P$3 U$10.P$2
3.3V1: BARO1.1 BARO1.2 C19.1 C24.1 C25.1 C26.2 C28.1 C38.2 C39.2 IC1.24 IC1.30 IMU1.P$1 IMU1.P$8 IMU1.P$13 IMU1.P$22 L2.1 LDO_VREG1.VOUT R11.1 R13.2 R14.2 R16.2 RGBLED1.1 U$1.P$3 U$2.P$2
3.3V2: BARO2.1 BARO2.2 C48.1 C51.1 C52.1 C53.2 C55.1 C61.2 C62.2 IC2.24 IC2.30 IMU2.P$1 IMU2.P$8 IMU2.P$13 IMU2.P$22 L4.1 LDO_VREG2.VOUT R20.1 R22.2 R23.2 R25.2 RGBLED2.1 U$4.P$3 U$6.P$2
3.3V3: BARO3.1 BARO3.2 C71.1 C74.1 C75.1 C76.2 C78.1 C84.2 C85.2 IC3.24 IC3.30 IMU3.P$1 IMU3.P$8 IMU3.P$13 IMU3.P$22 L7.1 LDO_VREG3.VOUT R29.1 R31.2 R32.2 R34.2 RGBLED3.1 U$8.P$3 U$11.P$2
3.3V4: BARO4.1 BARO4.2 C94.1 C97.1 C98.1 C99.2 C101.1 C107.2 C108.2 IC4.24 IC4.30 IMU4.P$1 IMU4.P$8 IMU4.P$13 IMU4.P$22 L9.1 LDO_VREG4.VOUT R38.1 R40.2 R41.2 R43.2 RGBLED4.1 U$13.P$3 U$14.P$2
3.3V5: BARO5.1 BARO5.2 C117.1 C120.1 C121.1 C122.2 C124.1 C130.2 C131.2 IC5.24 IC5.30 IMU5.P$1 IMU5.P$8 IMU5.P$13 IMU5.P$22 L11.1 LDO_VREG5.VOUT R47.1 R49.2 R50.2 R52.2 RGBLED5.1 U$16.P$3 U$17.P$2
3.3V6: BARO6.1 BARO6.2 C140.1 C143.1 C144.1 C145.2 C147.1 C153.2 C154.2 IC6.24 IC6.30 IMU6.P$1 IMU6.P$8 IMU6.P$13 IMU6.P$22 L13.1 LDO_VREG6.VOUT R56.1 R58.2 R59.2 R61.2 RGBLED6.1 U$19.P$3 U$20.P$2
3.3V7: BARO7.1 BARO7.2 C163.1 C166.1 C167.1 C168.2 C170.1 C176.2 C177.2 IC7.24 IC7.30 IMU7.P$1 IMU7.P$8 IMU7.P$13 IMU7.P$22 L15.1 LDO_VREG7.VOUT R65.1 R67.2 R68.2 R70.2 RGBLED7.1 U$22.P$3 U$23.P$2
ANT_OUT: BALUN.1 C2.1
ANT_OUT1: BALUN1.1 C41.1
ANT_OUT2: BALUN2.1 C64.1
ANT_OUT3: BALUN3.1 C87.1
ANT_OUT4: BALUN4.1 C110.1
ANT_OUT5: BALUN5.1 C133.1
ANT_OUT6: BALUN6.1 C156.1
ANT_OUT7: BALUN7.1 C179.1
ANT_SMD: C12.2 C17.1 L1.1
ANT_SMD1: C45.2 C46.1 L3.1
ANT_SMD2: C68.2 C69.1 L5.1
ANT_SMD3: C91.2 C92.1 L8.1
ANT_SMD4: C114.2 C115.1 L10.1
ANT_SMD5: C137.2 C138.1 L12.1
ANT_SMD6: C160.2 C161.1 L14.1
ANT_SMD7: C183.2 C184.1 L16.1
ANT_UFL: C11.2 UFLANT.3
ANT_UFL1: C44.2 UFLANT1.3
ANT_UFL2: C67.2 UFLANT2.3
ANT_UFL3: C90.2 UFLANT3.3
ANT_UFL4: C113.2 UFLANT4.3
ANT_UFL5: C136.2 UFLANT5.3
ANT_UFL6: C159.2 UFLANT6.3
ANT_UFL7: C182.2 UFLANT7.3
AVDD: C_ARR.3 IC.5
AVDD1: C_ARR1.3 IC1.5
AVDD2: C_ARR2.3 IC2.5
AVDD3: C_ARR3.3 IC3.5
AVDD4: C_ARR4.3 IC4.5
AVDD5: C_ARR5.3 IC5.5
AVDD6: C_ARR6.3 IC6.5
AVDD7: C_ARR7.3 IC7.5
DVDD: C_ARR.5 IC.21
DVDD1: C_ARR1.5 IC1.21
DVDD2: C_ARR2.5 IC2.21
DVDD3: C_ARR3.5 IC3.21
DVDD4: C_ARR4.5 IC4.21
DVDD5: C_ARR5.5 IC5.21
DVDD6: C_ARR6.5 IC6.21
DVDD7: C_ARR7.5 IC7.21
GND: ASWITCH.PIN2 BALUN.2 BALUN.5 BALUN.6 BARO.3 BARO.4 BARO.5 BTN_RESET.2 C1.2 C3.1 C4.2 C5.2 C6.2 C7.2 C8.2 C9.2 C10.2 C13.2 C14.1 C15.2 C16.2 C17.2 C21.1 C22.1 C29.2 C30.1 C31.1 C32.2 C_ARR.2 C_ARR.4 C_ARR.6 C_ARR.8 FB1.2 FB3.1 FB3.2 IC.3 IC.6 IC.11 IC.14 IC.28 IC.33 IMU.P$20 LDO_VREG.GND SJ1.1 SMDANT.3 U$5.P$2 U$10.P$1 UFLANT.1 UFLANT.2 USB.5 XTAL_BOARD.2 XTAL_BOARD.4 XTAL_RF.2 XTAL_RF.4
GND1: ASWITCH1.PIN2 BALUN1.2 BALUN1.5 BALUN1.6 BARO1.3 BARO1.4 BARO1.5 BTN_RESET1.2 C18.2 C19.2 C20.2 C23.2 C24.2 C25.2 C26.1 C27.1 C28.2 C33.1 C34.2 C35.2 C36.1 C37.2 C38.1 C39.1 C40.2 C42.2 C43.2 C46.2 C_ARR1.2 C_ARR1.4 C_ARR1.6 C_ARR1.8 FB4.2 FB6.1 FB6.2 IC1.3 IC1.6 IC1.11 IC1.14 IC1.28 IC1.33 IMU1.P$20 LDO_VREG1.GND SJ2.1 SMDANT1.3 U$1.P$2 U$2.P$1 UFLANT1.1 UFLANT1.2 USB1.5 XTAL_BOARD1.2 XTAL_BOARD1.4 XTAL_RF1.2 XTAL_RF1.4
GND2: ASWITCH2.PIN2 BALUN2.2 BALUN2.5 BALUN2.6 BARO2.3 BARO2.4 BARO2.5 BTN_RESET2.2 C47.2 C48.2 C49.2 C50.2 C51.2 C52.2 C53.1 C54.1 C55.2 C56.1 C57.2 C58.2 C59.1 C60.2 C61.1 C62.1 C63.2 C65.2 C66.2 C69.2 C_ARR2.2 C_ARR2.4 C_ARR2.6 C_ARR2.8 FB7.2 FB9.1 FB9.2 IC2.3 IC2.6 IC2.11 IC2.14 IC2.28 IC2.33 IMU2.P$20 LDO_VREG2.GND SJ3.1 SMDANT2.3 U$4.P$2 U$6.P$1 UFLANT2.1 UFLANT2.2 USB2.5 XTAL_BOARD2.2 XTAL_BOARD2.4 XTAL_RF2.2 XTAL_RF2.4
GND3: ASWITCH3.PIN2 BALUN3.2 BALUN3.5 BALUN3.6 BARO3.3 BARO3.4 BARO3.5 BTN_RESET3.2 C70.2 C71.2 C72.2 C73.2 C74.2 C75.2 C76.1 C77.1 C78.2 C79.1 C80.2 C81.2 C82.1 C83.2 C84.1 C85.1 C86.2 C88.2 C89.2 C92.2 C_ARR3.2 C_ARR3.4 C_ARR3.6 C_ARR3.8 FB10.2 FB12.1 FB12.2 IC3.3 IC3.6 IC3.11 IC3.14 IC3.28 IC3.33 IMU3.P$20 LDO_VREG3.GND SJ4.1 SMDANT3.3 U$8.P$2 U$11.P$1 UFLANT3.1 UFLANT3.2 USB3.5 XTAL_BOARD3.2 XTAL_BOARD3.4 XTAL_RF3.2 XTAL_RF3.4
GND4: ASWITCH4.PIN2 BALUN4.2 BALUN4.5 BALUN4.6 BARO4.3 BARO4.4 BARO4.5 BTN_RESET4.2 C93.2 C94.2 C95.2 C96.2 C97.2 C98.2 C99.1 C100.1 C101.2 C102.1 C103.2 C104.2 C105.1 C106.2 C107.1 C108.1 C109.2 C111.2 C112.2 C115.2 C_ARR4.2 C_ARR4.4 C_ARR4.6 C_ARR4.8 FB13.2 FB15.1 FB15.2 IC4.3 IC4.6 IC4.11 IC4.14 IC4.28 IC4.33 IMU4.P$20 LDO_VREG4.GND SJ5.1 SMDANT4.3 U$13.P$2 U$14.P$1 UFLANT4.1 UFLANT4.2 USB4.5 XTAL_BOARD4.2 XTAL_BOARD4.4 XTAL_RF4.2 XTAL_RF4.4
GND5: ASWITCH5.PIN2 BALUN5.2 BALUN5.5 BALUN5.6 BARO5.3 BARO5.4 BARO5.5 BTN_RESET5.2 C116.2 C117.2 C118.2 C119.2 C120.2 C121.2 C122.1 C123.1 C124.2 C125.1 C126.2 C127.2 C128.1 C129.2 C130.1 C131.1 C132.2 C134.2 C135.2 C138.2 C_ARR5.2 C_ARR5.4 C_ARR5.6 C_ARR5.8 FB16.2 FB18.1 FB18.2 IC5.3 IC5.6 IC5.11 IC5.14 IC5.28 IC5.33 IMU5.P$20 LDO_VREG5.GND SJ6.1 SMDANT5.3 U$16.P$2 U$17.P$1 UFLANT5.1 UFLANT5.2 USB5.5 XTAL_BOARD5.2 XTAL_BOARD5.4 XTAL_RF5.2 XTAL_RF5.4
GND6: ASWITCH6.PIN2 BALUN6.2 BALUN6.5 BALUN6.6 BARO6.3 BARO6.4 BARO6.5 BTN_RESET6.2 C139.2 C140.2 C141.2 C142.2 C143.2 C144.2 C145.1 C146.1 C147.2 C148.1 C149.2 C150.2 C151.1 C152.2 C153.1 C154.1 C155.2 C157.2 C158.2 C161.2 C_ARR6.2 C_ARR6.4 C_ARR6.6 C_ARR6.8 FB19.2 FB21.1 FB21.2 IC6.3 IC6.6 IC6.11 IC6.14 IC6.28 IC6.33 IMU6.P$20 LDO_VREG6.GND SJ7.1 SMDANT6.3 U$19.P$2 U$20.P$1 UFLANT6.1 UFLANT6.2 USB6.5 XTAL_BOARD6.2 XTAL_BOARD6.4 XTAL_RF6.2 XTAL_RF6.4
GND7: ASWITCH7.PIN2 BALUN7.2 BALUN7.5 BALUN7.6 BARO7.3 BARO7.4 BARO7.5 BTN_RESET7.2 C162.2 C163.2 C164.2 C165.2 C166.2 C167.2 C168.1 C169.1 C170.2 C171.1 C172.2 C173.2 C174.1 C175.2 C176.1 C177.1 C178.2 C180.2 C181.2 C184.2 C_ARR7.2 C_ARR7.4 C_ARR7.6 C_ARR7.8 FB22.2 FB24.1 FB24.2 IC7.3 IC7.6 IC7.11 IC7.14 IC7.28 IC7.33 IMU7.P$20 LDO_VREG7.GND SJ8.1 SMDANT7.3 U$22.P$2 U$23.P$1 UFLANT7.1 UFLANT7.2 USB7.5 XTAL_BOARD7.2 XTAL_BOARD7.4 XTAL_RF7.2 XTAL_RF7.4
N$1: L1.2 SMDANT.1
N$2: C13.1 SMDANT.2
N$3: ASWITCH.PIN5 C2.2
N$4: C32.1 IMU.P$10
N$5: FB1.1 USB.6 USB.7 USB.8 USB.9 USB.10 USB.11
N$6: R3.1 R5.1 USB.4
N$7: FB2.1 USB.1
N$8: R6.2 RGBLED.3
N$9: R7.2 RGBLED.4
N$10: ASWITCH.PIN3 C11.1
N$11: ASWITCH.PIN1 C12.1
N$12: BTN_RESET1.1 R10.1
N$13: R4.2 RGBLED.2
N$14: R12.2 RGBLED1.2
N$15: C35.1 SMDANT1.2
N$16: C40.1 IMU1.P$10
N$17: FB4.1 USB1.6 USB1.7 USB1.8 USB1.9 USB1.10 USB1.11
N$18: R15.1 R16.1 USB1.4
N$19: R17.2 RGBLED1.3
N$20: R18.2 RGBLED1.4
N$21: FB5.1 USB1.1
N$22: ASWITCH1.PIN3 C44.1
N$23: ASWITCH1.PIN1 C45.1
N$24: ASWITCH1.PIN5 C41.2
N$25: L3.2 SMDANT1.1
N$26: BTN_RESET.1 R1.1
N$27: BTN_RESET2.1 R19.1
N$28: R21.2 RGBLED2.2
N$29: C58.1 SMDANT2.2
N$30: C63.1 IMU2.P$10
N$31: FB7.1 USB2.6 USB2.7 USB2.8 USB2.9 USB2.10 USB2.11
N$32: R24.1 R25.1 USB2.4
N$33: R26.2 RGBLED2.3
N$34: R27.2 RGBLED2.4
N$35: FB8.1 USB2.1
N$36: ASWITCH2.PIN3 C67.1
N$37: ASWITCH2.PIN1 C68.1
N$38: ASWITCH2.PIN5 C64.2
N$39: L5.2 SMDANT2.1
N$40: BTN_RESET3.1 R28.1
N$41: R30.2 RGBLED3.2
N$42: C81.1 SMDANT3.2
N$43: C86.1 IMU3.P$10
N$44: FB10.1 USB3.6 USB3.7 USB3.8 USB3.9 USB3.10 USB3.11
N$45: R33.1 R34.1 USB3.4
N$46: R35.2 RGBLED3.3
N$47: R36.2 RGBLED3.4
N$48: FB11.1 USB3.1
N$49: ASWITCH3.PIN3 C90.1
N$50: ASWITCH3.PIN1 C91.1
N$51: ASWITCH3.PIN5 C87.2
N$52: L8.2 SMDANT3.1
N$53: BTN_RESET4.1 R37.1
N$54: R39.2 RGBLED4.2
N$55: C104.1 SMDANT4.2
N$56: C109.1 IMU4.P$10
N$57: FB13.1 USB4.6 USB4.7 USB4.8 USB4.9 USB4.10 USB4.11
N$58: R42.1 R43.1 USB4.4
N$59: R44.2 RGBLED4.3
N$60: R45.2 RGBLED4.4
N$61: FB14.1 USB4.1
N$62: ASWITCH4.PIN3 C113.1
N$63: ASWITCH4.PIN1 C114.1
N$64: ASWITCH4.PIN5 C110.2
N$65: L10.2 SMDANT4.1
N$66: BTN_RESET5.1 R46.1
N$67: R48.2 RGBLED5.2
N$68: C127.1 SMDANT5.2
N$69: C132.1 IMU5.P$10
N$70: FB16.1 USB5.6 USB5.7 USB5.8 USB5.9 USB5.10 USB5.11
N$71: R51.1 R52.1 USB5.4
N$72: R53.2 RGBLED5.3
N$73: R54.2 RGBLED5.4
N$74: FB17.1 USB5.1
N$75: ASWITCH5.PIN3 C136.1
N$76: ASWITCH5.PIN1 C137.1
N$77: ASWITCH5.PIN5 C133.2
N$78: L12.2 SMDANT5.1
N$79: BTN_RESET6.1 R55.1
N$80: R57.2 RGBLED6.2
N$81: C150.1 SMDANT6.2
N$82: C155.1 IMU6.P$10
N$83: FB19.1 USB6.6 USB6.7 USB6.8 USB6.9 USB6.10 USB6.11
N$84: R60.1 R61.1 USB6.4
N$85: R62.2 RGBLED6.3
N$86: R63.2 RGBLED6.4
N$87: FB20.1 USB6.1
N$88: ASWITCH6.PIN3 C159.1
N$89: ASWITCH6.PIN1 C160.1
N$90: ASWITCH6.PIN5 C156.2
N$91: L14.2 SMDANT6.1
N$92: BTN_RESET7.1 R64.1
N$93: R66.2 RGBLED7.2
N$94: C173.1 SMDANT7.2
N$95: C178.1 IMU7.P$10
N$96: FB22.1 USB7.6 USB7.7 USB7.8 USB7.9 USB7.10 USB7.11
N$97: R69.1 R70.1 USB7.4
N$98: R71.2 RGBLED7.3
N$99: R72.2 RGBLED7.4
N$100: FB23.1 USB7.1
N$101: ASWITCH7.PIN3 C182.1
N$102: ASWITCH7.PIN1 C183.1
N$103: ASWITCH7.PIN5 C179.2
N$104: L16.2 SMDANT7.1
PA1: IC1.27 R15.2
PA2: IC2.27 R24.2
PA3: IC3.27 R33.2
PA4: IC4.27 R42.2
PA5: IC5.27 R51.2
PA6: IC6.27 R60.2
PA06(R): IC.7 R4.1
PA06(R)1: IC1.7 R12.1
PA06(R)2: IC2.7 R21.1
PA06(R)3: IC3.7 R30.1
PA06(R)4: IC4.7 R39.1
PA06(R)5: IC5.7 R48.1
PA06(R)6: IC6.7 R57.1
PA06(R)7: IC7.7 R66.1
PA7: IC7.27 R69.2
PA07(G): IC.8 R6.1
PA07(G)1: IC1.8 R17.1
PA07(G)2: IC2.8 R26.1
PA07(G)3: IC3.8 R35.1
PA07(G)4: IC4.8 R44.1
PA07(G)5: IC5.8 R53.1
PA07(G)6: IC6.8 R62.1
PA07(G)7: IC7.8 R71.1
PA08/I2C: ASWITCH.PIN6 C9.1 IC.9 U$9.P$2
PA08/I2C1: ASWITCH1.PIN6 C43.1 IC1.9 U$3.P$2
PA08/I2C2: ASWITCH2.PIN6 C66.1 IC2.9 U$7.P$2
PA08/I2C3: ASWITCH3.PIN6 C89.1 IC3.9 U$12.P$2
PA08/I2C4: ASWITCH4.PIN6 C112.1 IC4.9 U$15.P$2
PA08/I2C5: ASWITCH5.PIN6 C135.1 IC5.9 U$18.P$2
PA08/I2C6: ASWITCH6.PIN6 C158.1 IC6.9 U$21.P$2
PA08/I2C7: ASWITCH7.PIN6 C181.1 IC7.9 U$24.P$2
PA09/I2C: ASWITCH.PIN4 C8.1 IC.10 U$9.P$1
PA09/I2C1: ASWITCH1.PIN4 C42.1 IC1.10 U$3.P$1
PA09/I2C2: ASWITCH2.PIN4 C65.1 IC2.10 U$7.P$1
PA09/I2C3: ASWITCH3.PIN4 C88.1 IC3.10 U$12.P$1
PA09/I2C4: ASWITCH4.PIN4 C111.1 IC4.10 U$15.P$1
PA09/I2C5: ASWITCH5.PIN4 C134.1 IC5.10 U$18.P$1
PA09/I2C6: ASWITCH6.PIN4 C157.1 IC6.10 U$21.P$1
PA09/I2C7: ASWITCH7.PIN4 C180.1 IC7.10 U$24.P$1
PA14/XIN_MC: C3.2 IC.15 XTAL_BOARD.1
PA14/XIN_MC1: C33.2 IC1.15 XTAL_BOARD1.1
PA14/XIN_MC2: C56.2 IC2.15 XTAL_BOARD2.1
PA14/XIN_MC3: C79.2 IC3.15 XTAL_BOARD3.1
PA14/XIN_MC4: C102.2 IC4.15 XTAL_BOARD4.1
PA14/XIN_MC5: C125.2 IC5.15 XTAL_BOARD5.1
PA14/XIN_MC6: C148.2 IC6.15 XTAL_BOARD6.1
PA14/XIN_MC7: C171.2 IC7.15 XTAL_BOARD7.1
PA15/XOUT_MC: C4.1 IC.16 U$5.P$8 XTAL_BOARD.3
PA15/XOUT_MC1: C34.1 IC1.16 U$1.P$8 XTAL_BOARD1.3
PA15/XOUT_MC2: C57.1 IC2.16 U$4.P$8 XTAL_BOARD2.3
PA15/XOUT_MC3: C80.1 IC3.16 U$8.P$8 XTAL_BOARD3.3
PA15/XOUT_MC4: C103.1 IC4.16 U$13.P$8 XTAL_BOARD4.3
PA15/XOUT_MC5: C126.1 IC5.16 U$16.P$8 XTAL_BOARD5.3
PA15/XOUT_MC6: C149.1 IC6.16 U$19.P$8 XTAL_BOARD6.3
PA15/XOUT_MC7: C172.1 IC7.16 U$22.P$8 XTAL_BOARD7.3
PA16/I2C: BARO.7 IC.17 IMU.P$24 R8.1 U$5.P$7
PA16/I2C1: BARO1.7 IC1.17 IMU1.P$24 R13.1 U$1.P$7
PA16/I2C2: BARO2.7 IC2.17 IMU2.P$24 R22.1 U$4.P$7
PA16/I2C3: BARO3.7 IC3.17 IMU3.P$24 R31.1 U$8.P$7
PA16/I2C4: BARO4.7 IC4.17 IMU4.P$24 R40.1 U$13.P$7
PA16/I2C5: BARO5.7 IC5.17 IMU5.P$24 R49.1 U$16.P$7
PA16/I2C6: BARO6.7 IC6.17 IMU6.P$24 R58.1 U$19.P$7
PA16/I2C7: BARO7.7 IC7.17 IMU7.P$24 R67.1 U$22.P$7
PA17/I2C: BARO.8 IC.18 IMU.P$23 R9.1 U$5.P$6
PA17/I2C1: BARO1.8 IC1.18 IMU1.P$23 R14.1 U$1.P$6
PA17/I2C2: BARO2.8 IC2.18 IMU2.P$23 R23.1 U$4.P$6
PA17/I2C3: BARO3.8 IC3.18 IMU3.P$23 R32.1 U$8.P$6
PA17/I2C4: BARO4.8 IC4.18 IMU4.P$23 R41.1 U$13.P$6
PA17/I2C5: BARO5.8 IC5.18 IMU5.P$23 R50.1 U$16.P$6
PA17/I2C6: BARO6.8 IC6.18 IMU6.P$23 R59.1 U$19.P$6
PA17/I2C7: BARO7.8 IC7.18 IMU7.P$23 R68.1 U$22.P$6
PA18/FSYNC: IC.19 IMU.P$11 SJ1.2 U$5.P$5
PA18/FSYNC1: IC1.19 IMU1.P$11 SJ2.2 U$1.P$5
PA18/FSYNC2: IC2.19 IMU2.P$11 SJ3.2 U$4.P$5
PA18/FSYNC3: IC3.19 IMU3.P$11 SJ4.2 U$8.P$5
PA18/FSYNC4: IC4.19 IMU4.P$11 SJ5.2 U$13.P$5
PA18/FSYNC5: IC5.19 IMU5.P$11 SJ6.2 U$16.P$5
PA18/FSYNC6: IC6.19 IMU6.P$11 SJ7.2 U$19.P$5
PA18/FSYNC7: IC7.19 IMU7.P$11 SJ8.2 U$22.P$5
PA19/INT: IC.20 IMU.P$12 U$5.P$4
PA19/INT1: IC1.20 IMU1.P$12 U$1.P$4
PA19/INT2: IC2.20 IMU2.P$12 U$4.P$4
PA19/INT3: IC3.20 IMU3.P$12 U$8.P$4
PA19/INT4: IC4.20 IMU4.P$12 U$13.P$4
PA19/INT5: IC5.20 IMU5.P$12 U$16.P$4
PA19/INT6: IC6.20 IMU6.P$12 U$19.P$4
PA19/INT7: IC7.20 IMU7.P$12 U$22.P$4
PA24/USBDM: IC.22 USB.2
PA24/USBDM1: IC1.22 USB1.2
PA24/USBDM2: IC2.22 USB2.2
PA24/USBDM3: IC3.22 USB3.2
PA24/USBDM4: IC4.22 USB4.2
PA24/USBDM5: IC5.22 USB5.2
PA24/USBDM6: IC6.22 USB6.2
PA24/USBDM7: IC7.22 USB7.2
PA25/USBDP: IC.23 USB.3
PA25/USBDP1: IC1.23 USB1.3
PA25/USBDP2: IC2.23 USB2.3
PA25/USBDP3: IC3.23 USB3.3
PA25/USBDP4: IC4.23 USB4.3
PA25/USBDP5: IC5.23 USB5.3
PA25/USBDP6: IC6.23 USB6.3
PA25/USBDP7: IC7.23 USB7.3
PA27(B): IC.25 R7.1
PA27(B)1: IC1.25 R18.1
PA27(B)2: IC2.25 R27.1
PA27(B)3: IC3.25 R36.1
PA27(B)4: IC4.25 R45.1
PA27(B)5: IC5.25 R54.1
PA27(B)6: IC6.25 R63.1
PA27(B)7: IC7.25 R72.1
PA28: IC.27 R3.2
PA30/SWCLK: IC.31 U$10.P$4
PA30/SWCLK1: IC1.31 U$2.P$4
PA30/SWCLK2: IC2.31 U$6.P$4
PA30/SWCLK3: IC3.31 U$11.P$4
PA30/SWCLK4: IC4.31 U$14.P$4
PA30/SWCLK5: IC5.31 U$17.P$4
PA30/SWCLK6: IC6.31 U$20.P$4
PA30/SWCLK7: IC7.31 U$23.P$4
PA31/SWDIO: IC.32 U$10.P$5
PA31/SWDIO1: IC1.32 U$2.P$5
PA31/SWDIO2: IC2.32 U$6.P$5
PA31/SWDIO3: IC3.32 U$11.P$5
PA31/SWDIO4: IC4.32 U$14.P$5
PA31/SWDIO5: IC5.32 U$17.P$5
PA31/SWDIO6: IC6.32 U$20.P$5
PA31/SWDIO7: IC7.32 U$23.P$5
RESET: C1.1 IC.26 R1.2 R2.2 U$10.P$3
RESET1: C18.1 IC1.26 R10.2 R11.2 U$2.P$3
RESET2: C47.1 IC2.26 R19.2 R20.2 U$6.P$3
RESET3: C70.1 IC3.26 R28.2 R29.2 U$11.P$3
RESET4: C93.1 IC4.26 R37.2 R38.2 U$14.P$3
RESET5: C116.1 IC5.26 R46.2 R47.2 U$17.P$3
RESET6: C139.1 IC6.26 R55.2 R56.2 U$20.P$3
RESET7: C162.1 IC7.26 R64.2 R65.2 U$23.P$3
RFN: BALUN.3 IC.13
RFN1: BALUN1.3 IC1.13
RFN2: BALUN2.3 IC2.13
RFN3: BALUN3.3 IC3.13
RFN4: BALUN4.3 IC4.13
RFN5: BALUN5.3 IC5.13
RFN6: BALUN6.3 IC6.13
RFN7: BALUN7.3 IC7.13
RFP: BALUN.4 IC.12
RFP1: BALUN1.4 IC1.12
RFP2: BALUN2.4 IC2.12
RFP3: BALUN3.4 IC3.12
RFP4: BALUN4.4 IC4.12
RFP5: BALUN5.4 IC5.12
RFP6: BALUN6.4 IC6.12
RFP7: BALUN7.4 IC7.12
VDDANA: C22.2 C_ARR.1 IC.4 L6.2
VDDANA1: C27.2 C_ARR1.1 IC1.4 L2.2
VDDANA2: C54.2 C_ARR2.1 IC2.4 L4.2
VDDANA3: C77.2 C_ARR3.1 IC3.4 L7.2
VDDANA4: C100.2 C_ARR4.1 IC4.4 L9.2
VDDANA5: C123.2 C_ARR5.1 IC5.4 L11.2
VDDANA6: C146.2 C_ARR6.1 IC6.4 L13.2
VDDANA7: C169.2 C_ARR7.1 IC7.4 L15.2
VDDCORE: C_ARR.7 IC.29
VDDCORE1: C_ARR1.7 IC1.29
VDDCORE2: C_ARR2.7 IC2.29
VDDCORE3: C_ARR3.7 IC3.29
VDDCORE4: C_ARR4.7 IC4.29
VDDCORE5: C_ARR5.7 IC5.29
VDDCORE6: C_ARR6.7 IC6.29
VDDCORE7: C_ARR7.7 IC7.29
VIN: C6.1 C7.1 FB2.2 LDO_VREG.VIN U$5.P$1
VIN1: C20.1 C23.1 FB5.2 LDO_VREG1.VIN U$1.P$1
VIN2: C49.1 C50.1 FB8.2 LDO_VREG2.VIN U$4.P$1
VIN3: C72.1 C73.1 FB11.2 LDO_VREG3.VIN U$8.P$1
VIN4: C95.1 C96.1 FB14.2 LDO_VREG4.VIN U$13.P$1
VIN5: C118.1 C119.1 FB17.2 LDO_VREG5.VIN U$16.P$1
VIN6: C141.1 C142.1 FB20.2 LDO_VREG6.VIN U$19.P$1
VIN7: C164.1 C165.1 FB23.2 LDO_VREG7.VIN U$22.P$1
XTALIN: C14.2 IC.2 XTAL_RF.1
XTALIN1: C36.2 IC1.2 XTAL_RF1.1
XTALIN2: C59.2 IC2.2 XTAL_RF2.1
XTALIN3: C82.2 IC3.2 XTAL_RF3.1
XTALIN4: C105.2 IC4.2 XTAL_RF4.1
XTALIN5: C128.2 IC5.2 XTAL_RF5.1
XTALIN6: C151.2 IC6.2 XTAL_RF6.1
XTALIN7: C174.2 IC7.2 XTAL_RF7.1
XTALOUT: C15.1 IC.1 XTAL_RF.3
XTALOUT1: C37.1 IC1.1 XTAL_RF1.3
XTALOUT2: C60.1 IC2.1 XTAL_RF2.3
XTALOUT3: C83.1 IC3.1 XTAL_RF3.3
XTALOUT4: C106.1 IC4.1 XTAL_RF4.3
XTALOUT5: C129.1 IC5.1 XTAL_RF5.3
XTALOUT6: C152.1 IC6.1 XTAL_RF6.3
XTALOUT7: C175.1 IC7.1 XTAL_RF7.3

## Tracks (layer width: path | path; a pad name or v marks a point on that pad's centre or on a via)
3.3V  (via drill 0.3 pad 0.51)
  Top 0.203: IMU.P$13 17.27,9.66 17.27,9.02 | IMU.P$22 20.63,11.38 v20.83,11.18 | IMU.P$1 19.29,12.94 C10.1
  Top 0.254: IMU.P$8 16.16,11.78 16,11.94 16,12.83 15.3,13.53 LDO_VREG.VOUT | IC.24 20.83,11.11 v20.83,11.18 | v18.54,14.61 18.54,14.48 18.8,14.22 19.56,14.22 19.81,13.97 C10.1 | IC.30 22.73,6.81 22.73,6.35 | R2.1 11.68,4.19 U$10.P$2 | R5.2 15.62,9.14 15.75,9.02 17.27,9.02 19.68,9.02 19.81,8.89 C31.2 C30.2 19.81,7.11 v20.19,6.73 20.57,6.35 22.73,6.35 | C16.1 C21.2 22.73,5.59 22.73,6.35 | RGBLED.1 28.19,5.38 L6.1 29.01,6.2 BARO.2 BARO.1 30.01,8.73 R8.2 R9.2
  Top 0.508: LDO_VREG.VOUT 13.97,13.55 C5.1
  Route15 0.508: 11.68,7.11 12.45,6.35 13.21,6.35 14.1,7.24 15.49,7.24 16,7.75 16,8.26 16.38,8.64 18.29,8.64 v20.19,6.73 20.57,6.35 22.1,6.35 23.88,4.57 28.07,4.57 28.95,3.68 C29.1 28.97,3.68 30.61,3.68 31.11,4.19 31.11,5.46 30.01,6.57 30.01,8.73 R8.2 | 11.68,7.11 11.68,15.49 | 11.68,15.49 11.68,16.64 U$5.P$3 | 11.68,15.49 12.7,14.48 C5.1 18.41,14.48 v18.54,14.61 19.3,14.61 20.83,13.08 v20.83,11.18 | U$10.P$2 11.68,4.19 11.68,7.11
  other vias: 13.97,14.48 28.96,3.67 29.97,8.76
3.3V1  (via drill 0.3 pad 0.51)
  Top 0.203: IMU1.P$13 54.99,9.66 54.99,9.02 | IMU1.P$22 58.35,11.38 v58.55,11.18 | IMU1.P$1 57.01,12.94 C28.1
  Top 0.254: IMU1.P$8 53.88,11.78 53.72,11.94 53.72,12.83 53.02,13.53 LDO_VREG1.VOUT | IC1.24 58.55,11.11 v58.55,11.18 | v56.26,14.61 56.26,14.48 56.52,14.22 57.28,14.22 57.53,13.97 C28.1 | IC1.30 60.45,6.81 60.45,6.35 | R11.1 49.4,4.19 U$2.P$2 | R16.2 53.34,9.14 53.47,9.02 54.99,9.02 57.4,9.02 57.53,8.89 C38.2 C39.2 57.53,7.11 v57.91,6.73 58.29,6.35 60.45,6.35 | C25.1 C26.2 60.45,5.59 60.45,6.35 | RGBLED1.1 65.91,5.38 L2.1 66.73,6.2 BARO1.2 BARO1.1 67.73,8.73 R13.2 R14.2
  Top 0.508: LDO_VREG1.VOUT 51.69,13.55 C19.1
  Route15 0.508: 49.4,7.11 50.16,6.35 50.93,6.35 51.82,7.24 53.21,7.24 53.72,7.75 53.72,8.26 54.1,8.64 56.01,8.64 v57.91,6.73 58.29,6.35 59.82,6.35 61.59,4.57 65.79,4.57 66.67,3.68 C24.1 66.69,3.68 68.33,3.68 68.83,4.19 68.83,5.46 67.73,6.57 67.73,8.73 R13.2 | 49.4,7.11 49.4,15.49 | 49.4,15.49 49.4,16.64 U$1.P$3 | 49.4,15.49 50.42,14.48 C19.1 56.13,14.48 v56.26,14.61 57.02,14.61 58.55,13.08 v58.55,11.18 | U$2.P$2 49.4,4.19 49.4,7.11
  other vias: 51.69,14.48 66.67,3.67 67.69,8.76
3.3V2  (via drill 0.3 pad 0.51)
  Top 0.203: IMU2.P$13 92.71,9.66 92.71,9.02 | IMU2.P$22 96.07,11.38 v96.27,11.18 | IMU2.P$1 94.73,12.94 C55.1
  Top 0.254: IMU2.P$8 91.6,11.78 91.44,11.94 91.44,12.83 90.74,13.53 LDO_VREG2.VOUT | IC2.24 96.27,11.11 v96.27,11.18 | v93.98,14.61 93.98,14.48 94.23,14.22 95,14.22 95.25,13.97 C55.1 | IC2.30 98.17,6.81 98.17,6.35 | R20.1 87.12,4.19 U$6.P$2 | R25.2 91.06,9.14 91.19,9.02 92.71,9.02 95.12,9.02 95.25,8.89 C61.2 C62.2 95.25,7.11 v95.63,6.73 96.01,6.35 98.17,6.35 | C52.1 C53.2 98.17,5.59 98.17,6.35 | RGBLED2.1 103.62,5.38 L4.1 104.45,6.2 BARO2.2 BARO2.1 105.45,8.73 R22.2 R23.2
  Top 0.508: LDO_VREG2.VOUT 89.41,13.55 C48.1
  Route15 0.508: 87.12,7.11 87.88,6.35 88.65,6.35 89.53,7.24 90.93,7.24 91.44,7.75 91.44,8.26 91.82,8.64 93.73,8.64 v95.63,6.73 96.01,6.35 97.54,6.35 99.31,4.57 103.5,4.57 104.39,3.68 C51.1 104.41,3.68 106.05,3.68 106.55,4.19 106.55,5.46 105.45,6.57 105.45,8.73 R22.2 | 87.12,7.11 87.12,15.49 | 87.12,15.49 87.12,16.64 U$4.P$3 | 87.12,15.49 88.14,14.48 C48.1 93.85,14.48 v93.98,14.61 94.74,14.61 96.27,13.08 v96.27,11.18 | U$6.P$2 87.12,4.19 87.12,7.11
  other vias: 89.41,14.48 104.39,3.67 105.41,8.76
3.3V3  (via drill 0.3 pad 0.51)
  Top 0.203: IMU3.P$13 130.43,9.66 130.43,9.02 | IMU3.P$22 133.78,11.38 v133.99,11.18 | IMU3.P$1 132.44,12.94 C78.1
  Top 0.254: IMU3.P$8 129.32,11.78 129.16,11.94 129.16,12.83 128.46,13.53 LDO_VREG3.VOUT | IC3.24 133.99,11.11 v133.99,11.18 | v131.7,14.61 131.7,14.48 131.95,14.22 132.72,14.22 132.97,13.97 C78.1 | IC3.30 135.89,6.81 135.89,6.35 | R29.1 124.84,4.19 U$11.P$2 | R34.2 128.78,9.14 128.91,9.02 130.43,9.02 132.84,9.02 132.97,8.89 C84.2 C85.2 132.97,7.11 v133.35,6.73 133.73,6.35 135.89,6.35 | C75.1 C76.2 135.89,5.59 135.89,6.35 | RGBLED3.1 141.34,5.38 L7.1 142.17,6.2 BARO3.2 BARO3.1 143.17,8.73 R31.2 R32.2
  Top 0.508: LDO_VREG3.VOUT 127.13,13.55 C71.1
  Route15 0.508: 124.84,7.11 125.6,6.35 126.36,6.35 127.25,7.24 128.65,7.24 129.16,7.75 129.16,8.26 129.54,8.64 131.44,8.64 v133.35,6.73 133.73,6.35 135.25,6.35 137.03,4.57 141.22,4.57 142.11,3.68 C74.1 142.13,3.68 143.76,3.68 144.27,4.19 144.27,5.46 143.17,6.57 143.17,8.73 R31.2 | 124.84,7.11 124.84,15.49 | 124.84,15.49 124.84,16.64 U$8.P$3 | 124.84,15.49 125.86,14.48 C71.1 131.57,14.48 v131.7,14.61 132.46,14.61 133.99,13.08 v133.99,11.18 | U$11.P$2 124.84,4.19 124.84,7.11
  other vias: 127.13,14.48 142.11,3.67 143.13,8.76
3.3V4  (via drill 0.3 pad 0.51)
  Top 0.203: IMU4.P$13 17.27,28.2 17.27,27.56 | IMU4.P$22 20.63,29.92 v20.83,29.72 | IMU4.P$1 19.29,31.48 C101.1
  Top 0.254: IMU4.P$8 16.16,30.32 16,30.48 16,31.37 15.3,32.07 LDO_VREG4.VOUT | IC4.24 20.83,29.66 v20.83,29.72 | v18.54,33.15 18.54,33.02 18.8,32.77 19.56,32.77 19.81,32.51 C101.1 | IC4.30 22.73,25.36 22.73,24.89 | R38.1 11.68,22.73 U$14.P$2 | R43.2 15.62,27.69 15.75,27.56 17.27,27.56 19.68,27.56 19.81,27.43 C107.2 C108.2 19.81,25.65 v20.19,25.27 20.57,24.89 22.73,24.89 | C98.1 C99.2 22.73,24.13 22.73,24.89 | RGBLED4.1 28.19,23.92 L9.1 29.01,24.74 BARO4.2 BARO4.1 30.01,27.27 R40.2 R41.2
  Top 0.508: LDO_VREG4.VOUT 13.97,32.09 C94.1
  Route15 0.508: 11.68,25.65 12.45,24.89 13.21,24.89 14.1,25.78 15.49,25.78 16,26.29 16,26.8 16.38,27.18 18.29,27.18 v20.19,25.27 20.57,24.89 22.1,24.89 23.88,23.11 28.07,23.11 28.95,22.23 C97.1 28.97,22.23 30.61,22.23 31.11,22.73 31.11,24 30.01,25.11 30.01,27.27 R40.2 | 11.68,25.65 11.68,34.04 | 11.68,34.04 11.68,35.18 U$13.P$3 | 11.68,34.04 12.7,33.02 C94.1 18.41,33.02 v18.54,33.15 19.3,33.15 20.83,31.62 v20.83,29.72 | U$14.P$2 11.68,22.73 11.68,25.65
  other vias: 13.97,33.02 28.96,22.21 29.97,27.3
3.3V5  (via drill 0.3 pad 0.51)
  Top 0.203: IMU5.P$13 54.99,28.2 54.99,27.56 | IMU5.P$22 58.35,29.92 v58.55,29.72 | IMU5.P$1 57.01,31.48 C124.1
  Top 0.254: IMU5.P$8 53.88,30.32 53.72,30.48 53.72,31.37 53.02,32.07 LDO_VREG5.VOUT | IC5.24 58.55,29.66 v58.55,29.72 | v56.26,33.15 56.26,33.02 56.52,32.77 57.28,32.77 57.53,32.51 C124.1 | IC5.30 60.45,25.36 60.45,24.89 | R47.1 49.4,22.73 U$17.P$2 | R52.2 53.34,27.69 53.47,27.56 54.99,27.56 57.4,27.56 57.53,27.43 C130.2 C131.2 57.53,25.65 v57.91,25.27 58.29,24.89 60.45,24.89 | C121.1 C122.2 60.45,24.13 60.45,24.89 | RGBLED5.1 65.91,23.92 L11.1 66.73,24.74 BARO5.2 BARO5.1 67.73,27.27 R49.2 R50.2
  Top 0.508: LDO_VREG5.VOUT 51.69,32.09 C117.1
  Route15 0.508: 49.4,25.65 50.16,24.89 50.93,24.89 51.82,25.78 53.21,25.78 53.72,26.29 53.72,26.8 54.1,27.18 56.01,27.18 v57.91,25.27 58.29,24.89 59.82,24.89 61.59,23.11 65.79,23.11 66.67,22.23 C120.1 66.69,22.23 68.33,22.23 68.83,22.73 68.83,24 67.73,25.11 67.73,27.27 R49.2 | 49.4,25.65 49.4,34.04 | 49.4,34.04 49.4,35.18 U$16.P$3 | 49.4,34.04 50.42,33.02 C117.1 56.13,33.02 v56.26,33.15 57.02,33.15 58.55,31.62 v58.55,29.72 | U$17.P$2 49.4,22.73 49.4,25.65